# Altium PCB Rx_pcb.PcbDoc (part 1 of 2)
Units mm, origin at the board's own origin, x right, y up, seen from the top; angles counter-clockwise.
Board outline 77.98 x 77.98 mm, 4 copper layers (Top Layer, MidLayer1, MidLayer2, Bottom Layer); 173 components, 127 nets, 641 pads, 155 vias.
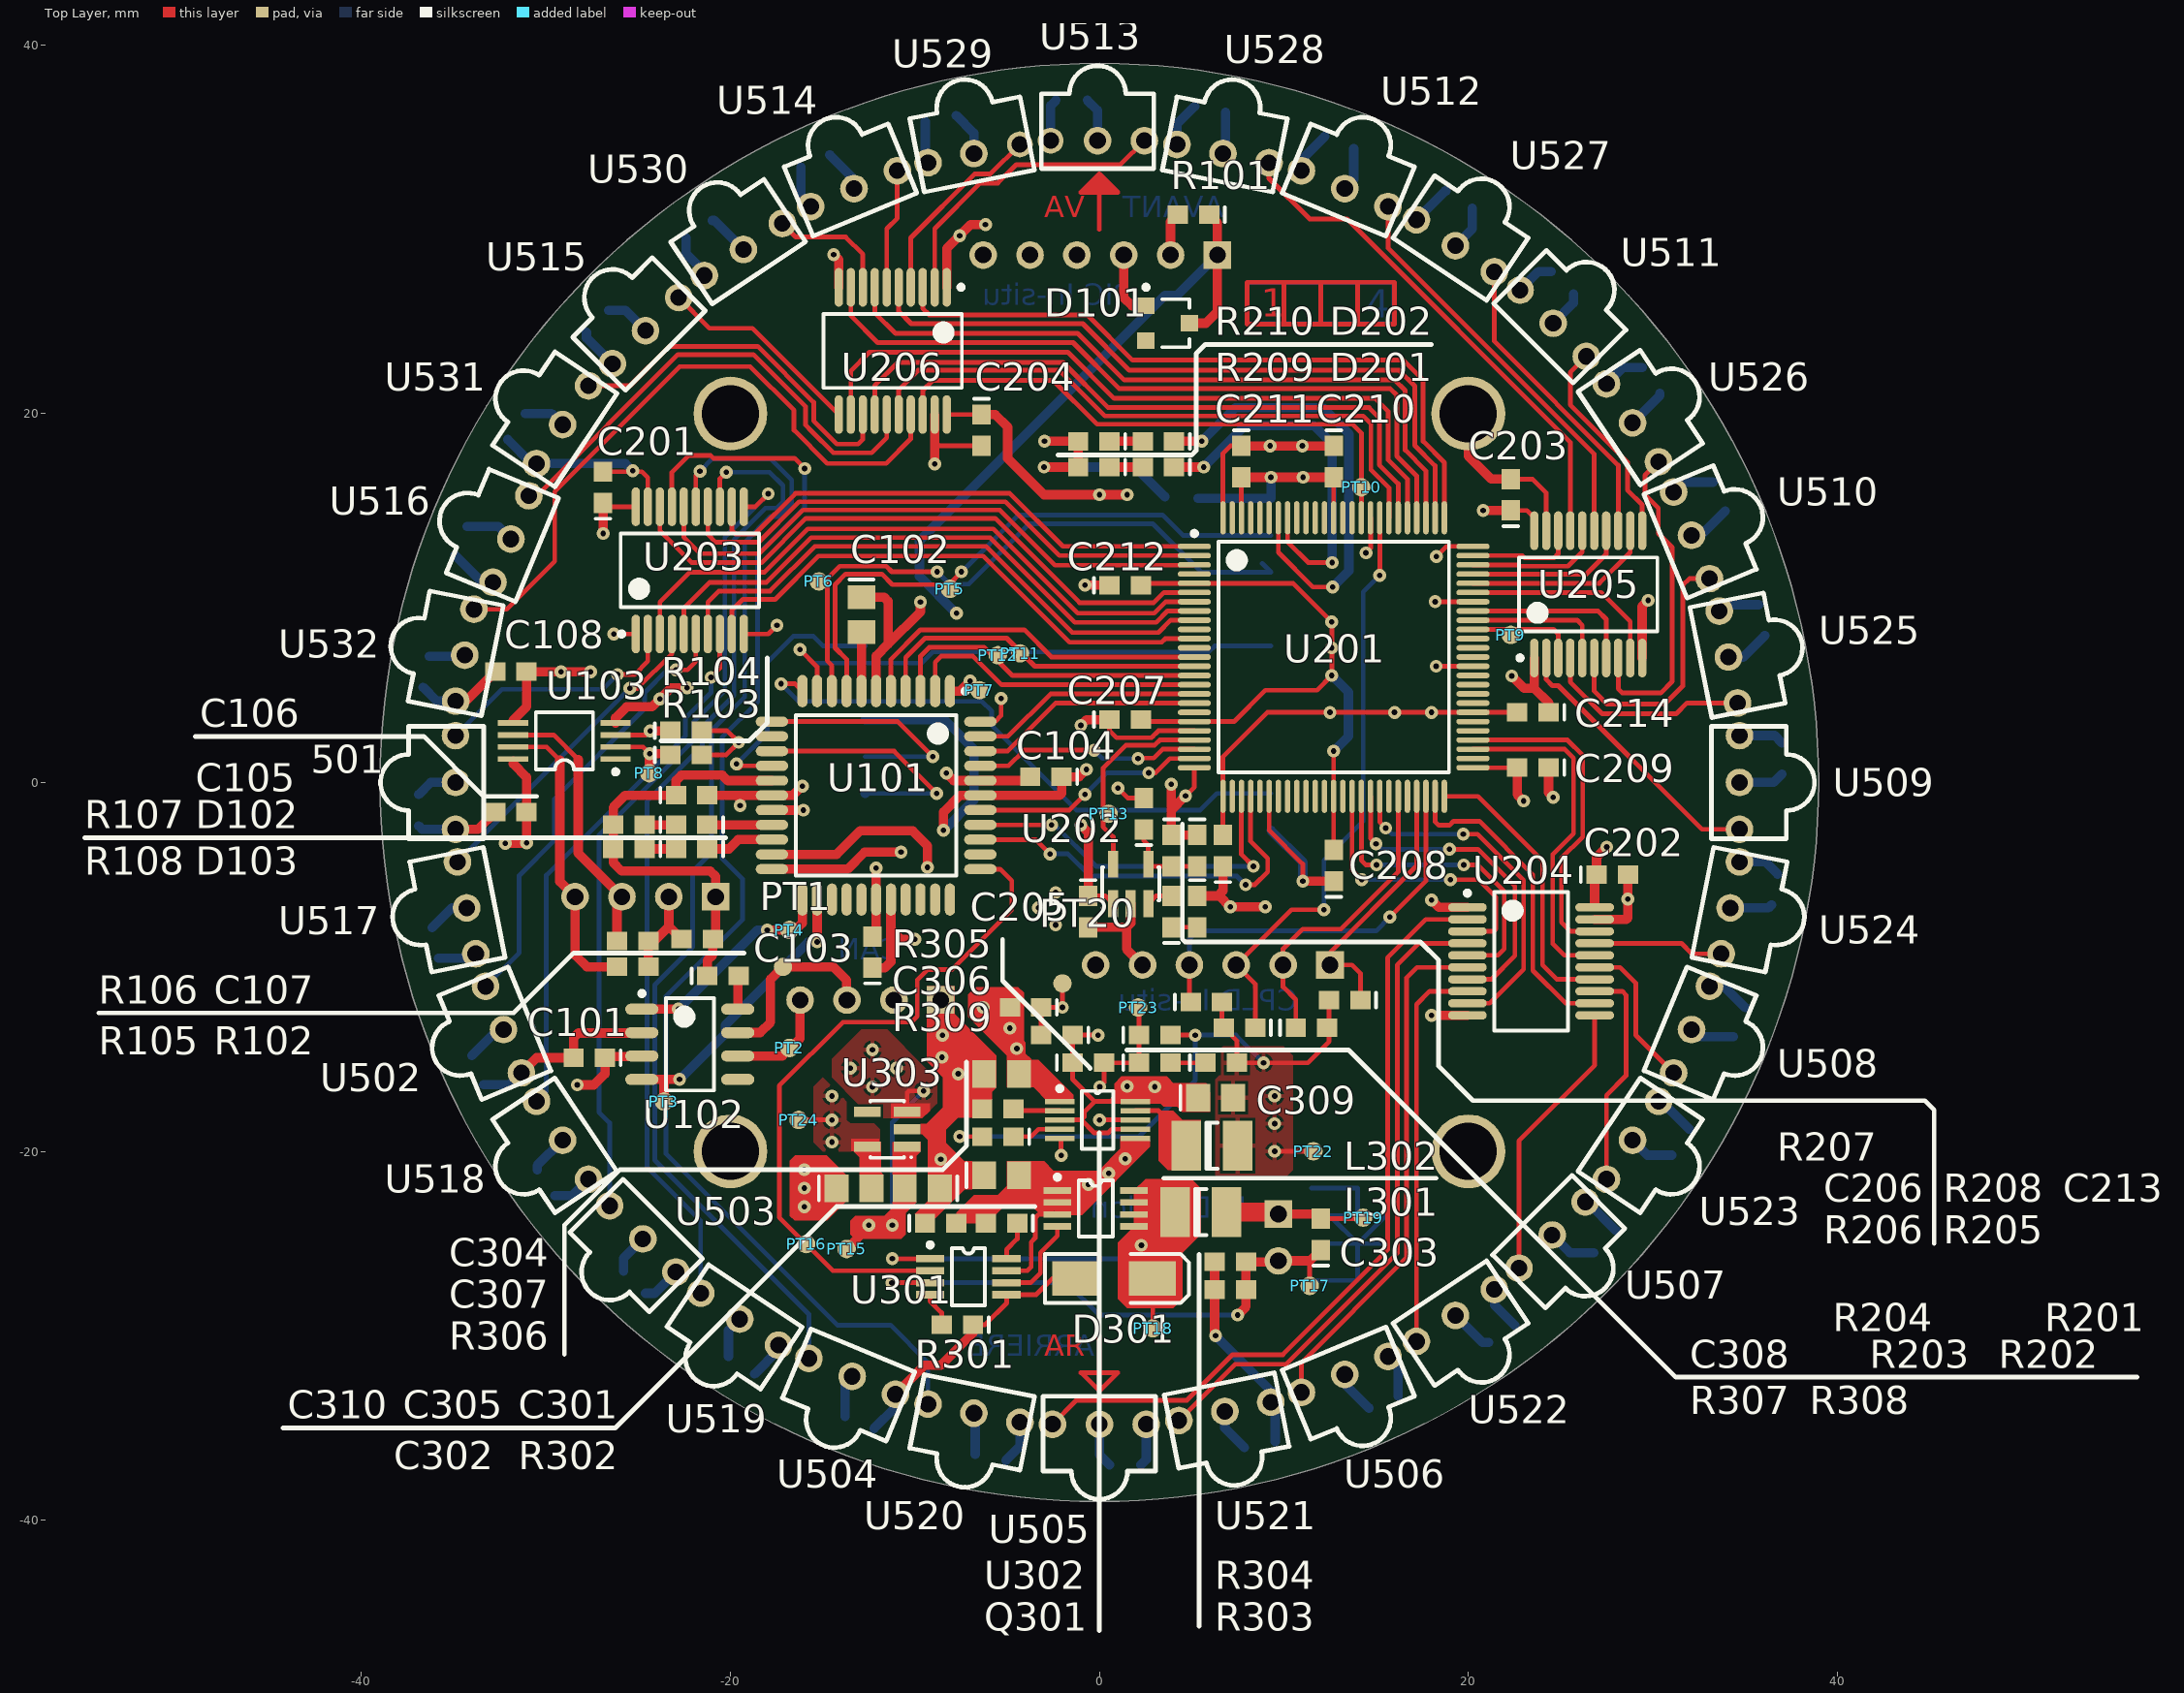
[diagram p0: Top Layer view]
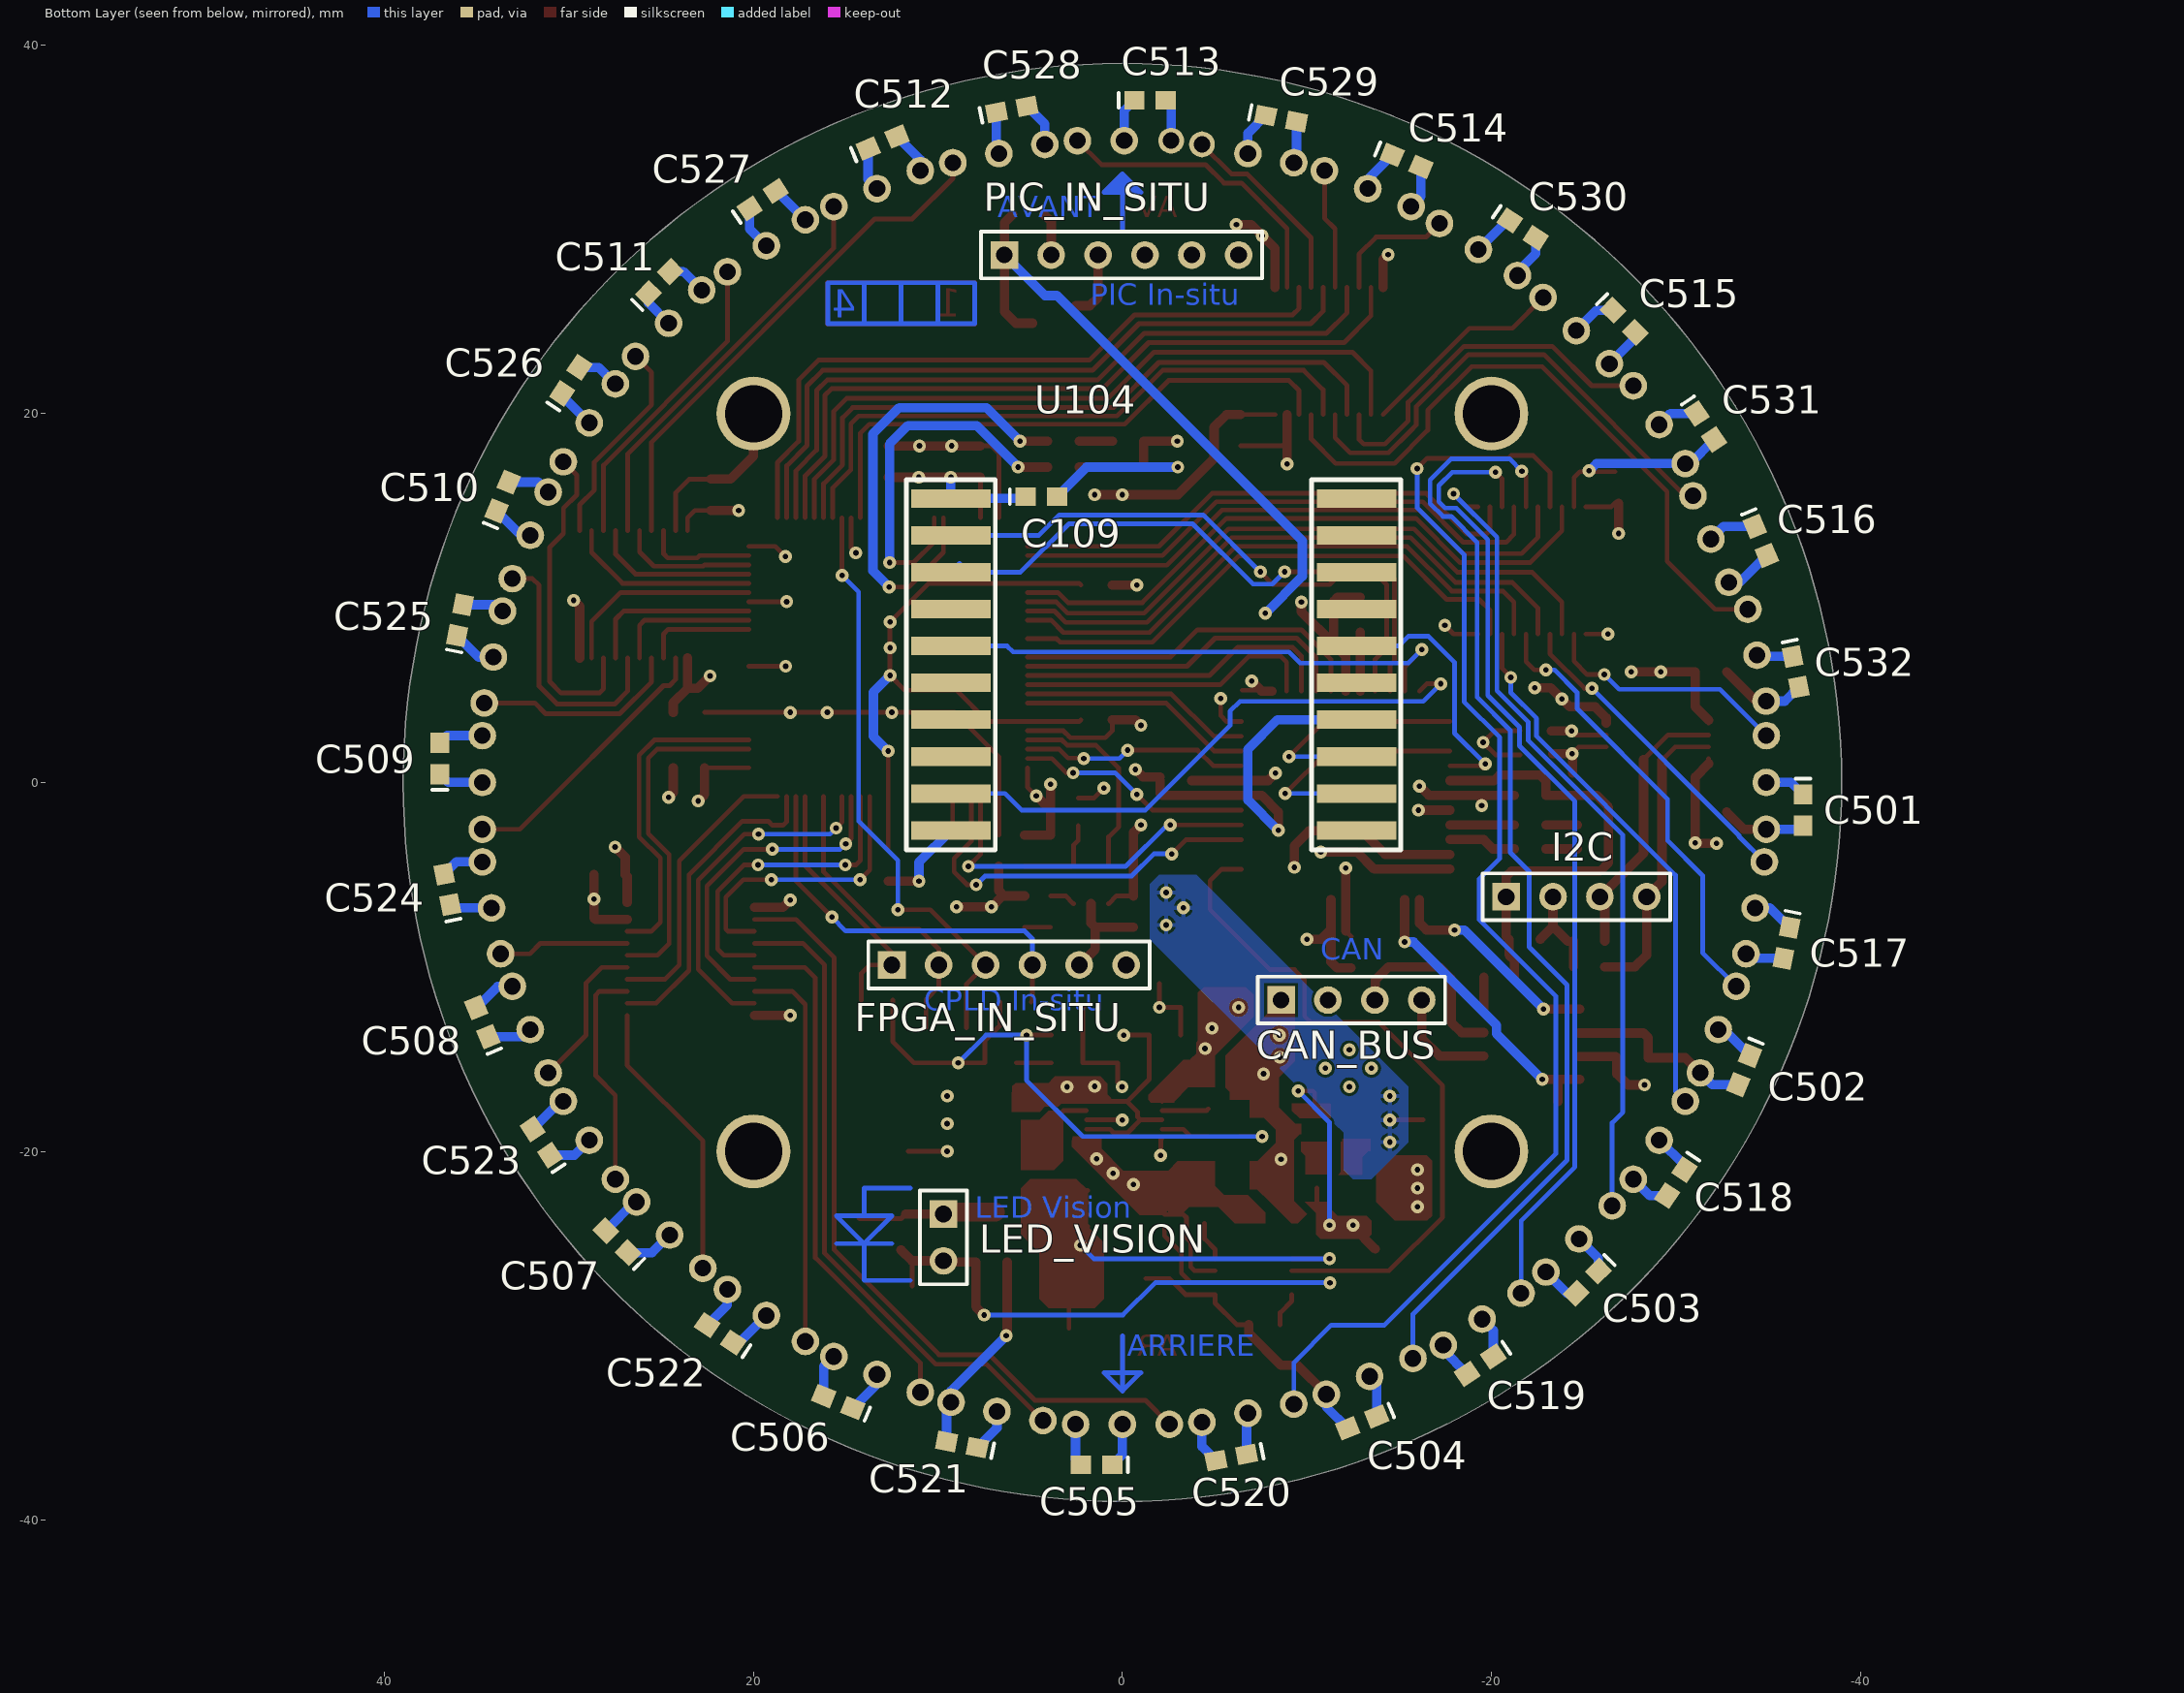
[diagram p1: Bottom Layer view, seen from below]
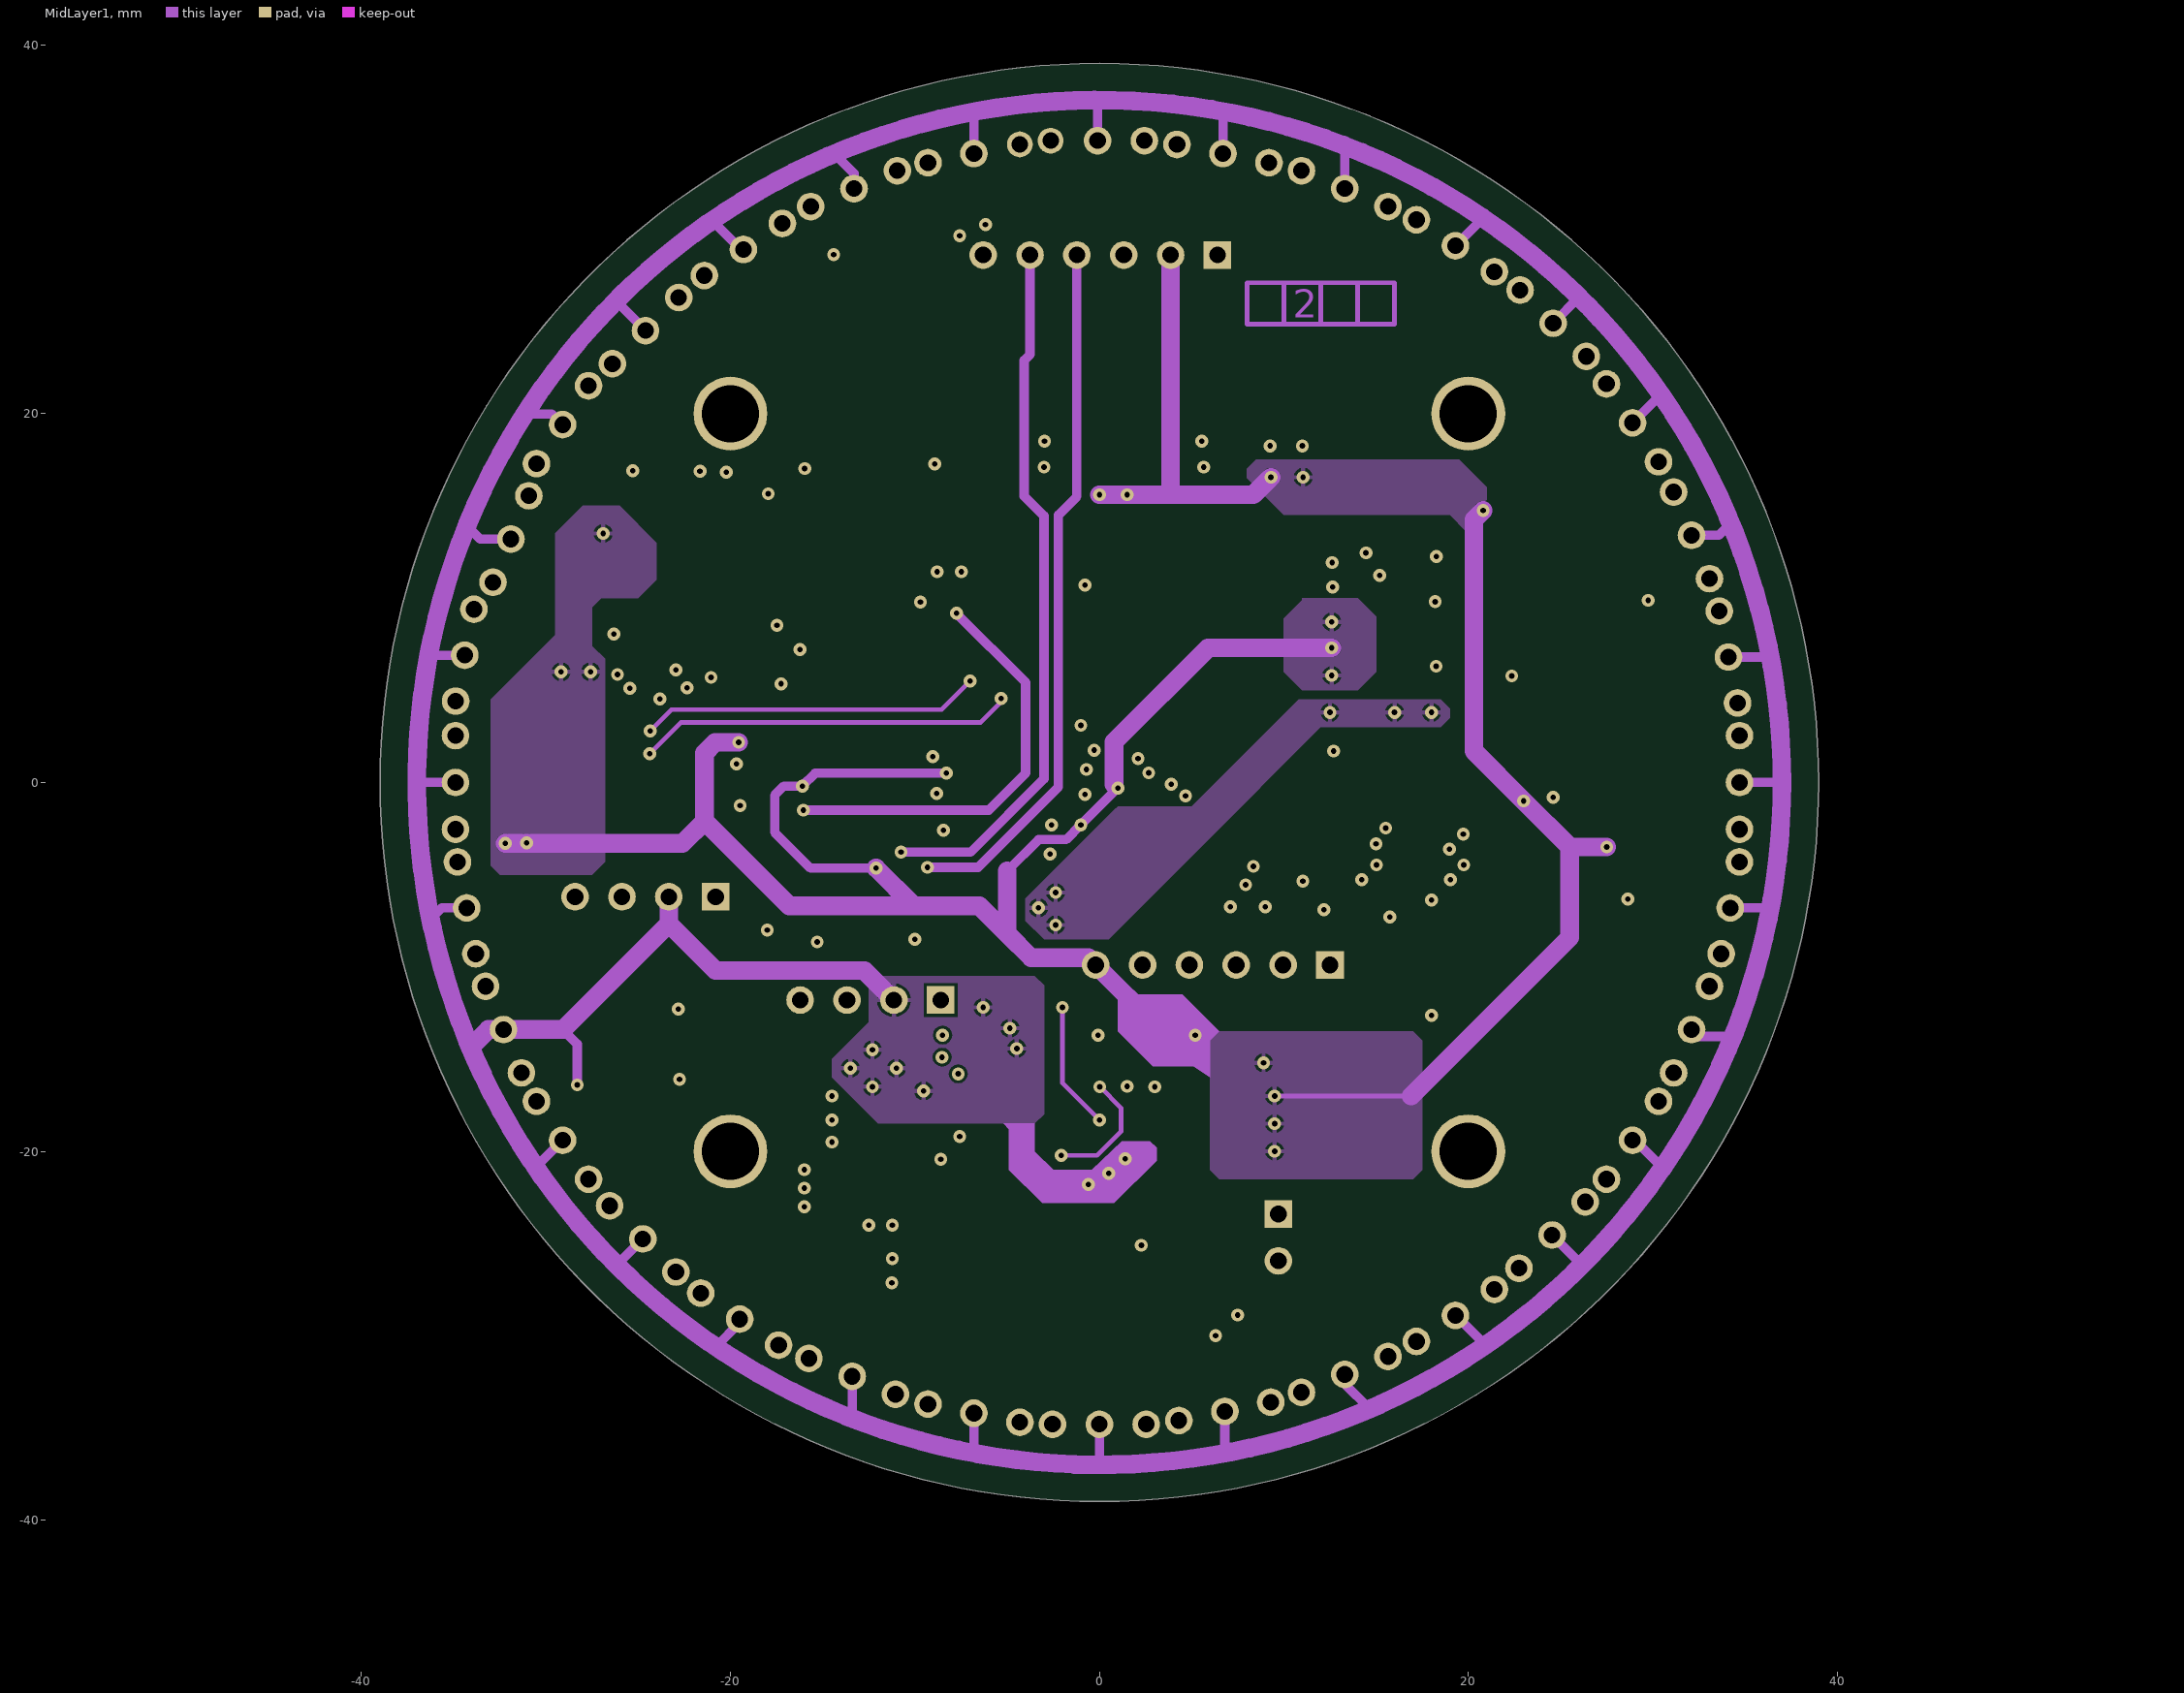
[diagram p2: MidLayer1]
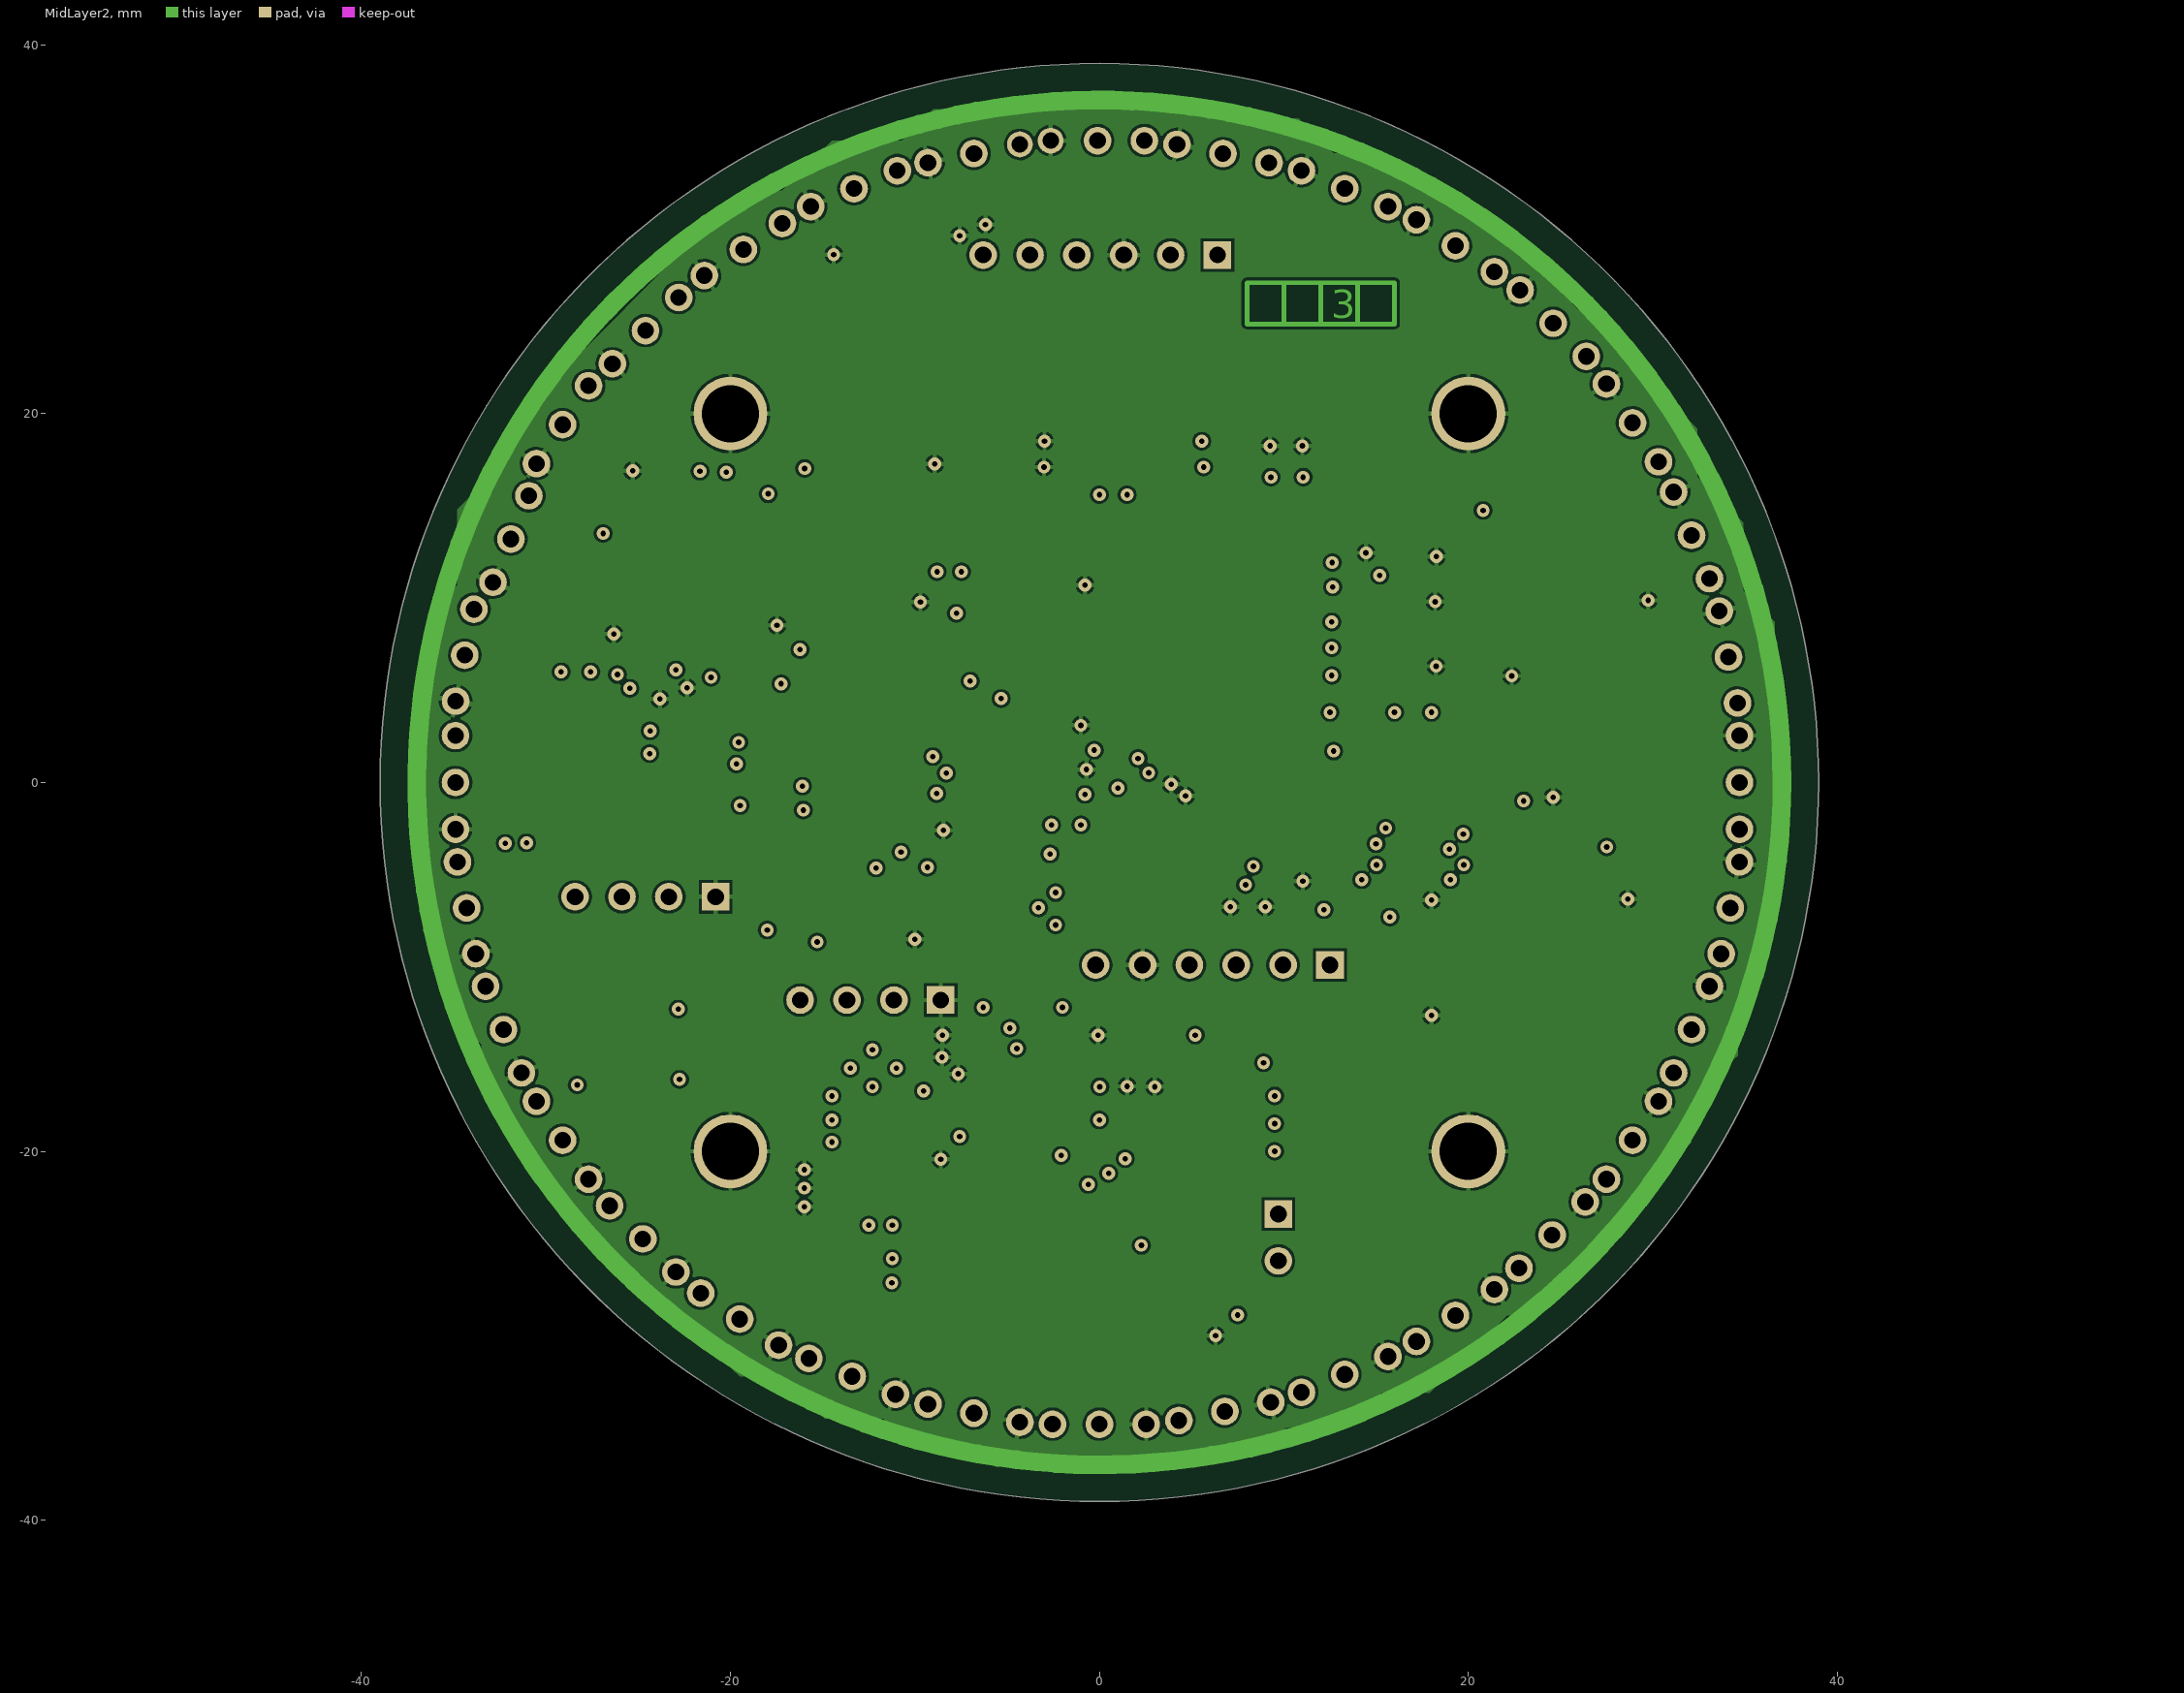
[diagram p3: MidLayer2]

## Layer stack, top to bottom
Top Layer: signal copper 0.0356
Dielectric: core 0.32, FR-4, Dk 4.8
MidLayer1: signal copper 0.0356
Dielectric: prepreg 0.32, FR-4, Dk 4.8
MidLayer2: signal copper 0.0356
Dielectric: core 0.32, FR-4, Dk 4.8
Bottom Layer: signal copper 0.0356

## Board outline
-38.989,0 ccw(c0,0) 0,-38.989 ccw(c0,0) 38.989,0 ccw(c0,0) 0,38.989 ccw(c0,0)

## Design rules (kind name [scope] priority, off if disabled: settings)
Clearance [All] p1: gap=0.15
ComponentClearance [All] p1: gap=0.01 collisioncheckmode=3 verticalgap=0.254 showdistances=TRUE
FanoutControl Fanout_Default [All] p5: bgadir=Out bgaviamode=Centered fanoutstyle=Auto fanoutdirection=None viagrid=0.025 // Fanout_Default (Default Rule)
HoleSize [All] p1: absolutevalues=TRUE maxlimit=6 minlimit=0.3 maxpercent=80.000 minpercent=20.000
PolygonConnect [All] p1: connectstyle=Relief reliefconductorwidth=0.254 reliefentries=4 polygonreliefangle="90 Angle"
RoomDefinition Rx_TSOP [InComponentClass('Rx_TSOP')] p1: confinementstyle=ConfineIn formatcopy=TRUE lockcomponents=FALSE outline -40,-40 40,-40 40,40 -40,40
RoomDefinition Rx_power [InComponentClass('Rx_power')] p2: confinementstyle=ConfineIn formatcopy=TRUE lockcomponents=FALSE outline -25.527,-40 25.273,-40 25.273,-3.048 -25.527,-3.048
RoomDefinition Rx_micro [InComponentClass('Rx_micro')] p3: confinementstyle=ConfineIn formatcopy=TRUE lockcomponents=FALSE outline -40,-40 40,-40 40,40 -40,40
RoomDefinition Rx_logic [InComponentClass('Rx_logic')] p4: confinementstyle=ConfineIn formatcopy=TRUE lockcomponents=FALSE outline -40,-40 40,-40 40,40 -40,40
RoutingVias [All] p1: holewidth=0.711 width=1.27 viastyle="Through Hole" minholewidth=0.3 minwidth=0.7 maxholewidth=1 maxwidth=1.4
SolderMaskExpansion [All] p1: expansion=0.102
TestPointUsage [All] p1: valid=0 allowmultiple=FALSE
Testpoint [All] p1: side=15 testpointundercomponent=TRUE minsize=1.016 maxsize=2.54 preferedsize=1.524 minholesize=0 maxholesize=1.016 preferedholesize=0.813 testpointgrid=0.025 style=1021 order=0-112345678
Width [All] p1: maxlimit=1.016 minlimit=0.15 preferedwidth=0.254
16 further rules are at their usual default settings.

## Classes and differential pairs
component class Rx_TSOP: 501 C501 C502 C503 C504 C505 C506 C507 C508 C509 C510 C511 C512 C513 C514 C515 C516 C517 C518 C519 C520 C521 C522 C523 C524 C525 C526 C527 C528 C529 C530 C531 C532 U502 U503 U504 U505 U506 U507 U508 U509 U510 U511 U512 U513 U514 U515 U516 U517 U518 U519 U520 U521 U522 U523 U524 U525 U526 U527 U528 U529 U530 U531 U532
component class Rx_logic: C201 C202 C203 C204 C205 C206 C207 C208 C209 C210 C211 C212 C213 C214 D201 D202 FPGA_IN_SITU PT9 PT10 PT11 PT12 PT13 R201 R202 R203 R204 R205 R206 R207 R208 R209 R210 U201 U202 U203 U204 U205 U206
component class Rx_micro: C101 C102 C103 C104 C105 C106 C107 C108 C109 C? CAN_BUS D101 D102 D103 D? I2C PIC_IN_SITU PT1 PT2 PT3 PT4 PT5 PT6 PT7 PT8 R101 R102 R103 R104 R105 R106 R107 R108 R? S101 U101 U102 U103 U104 U?
component class Rx_power: C301 C302 C303 C304 C305 C306 C307 C308 C309 C310 D301 L301 L302 LED_VISION PT15 PT16 PT17 PT18 PT19 PT20 PT22 PT23 PT24 Q301 R301 R302 R303 R304 R305 R306 R307 R308 R309 U301 U302 U303

## Components (designator, comment, footprint, x,y, rotation, side; value= is the part's Value field where it differs from the comment)
501 "TSOP22xx" TSOP22xx#1 -34.9,0 r0 top
C101 "100n cap 0603 X7R 25V" 0603 -27.65,-14.925 r180 top
C102 "10u cap 0805 X7R 25V" 0805 -12.9,9.1 r270 top
C103 "100n cap 0603 X7R 25V" 0603 -12.3,-9.2 r90 top
C104 "100n cap 0603 X7R 25V" 0603 -2.9,0.3 r180 top
C105 "100n cap 0603 X7R 25V" 0603 -22.1,-0.7 r0 top
C106 "100n cap 0603 X7R 25V" 1608[0603] -31.9,-1.6 r180 top
C107 "100n cap 0603 X7R 25V" 1608[0603] -21.8,-8.5 r180 top
C108 "100p cap 0603 X7R 25V" 1608[0603] -31.9,6 r0 top
C109 "100n cap 0603 X7R 25V" 0603 4.4,15.5 r180 bottom
C201 "100n cap 0603 X7R 25V" 0603 -26.9,16 r90 top
C202 "100n cap 0603 X7R 25V" 0603 27.8,-5 r0 top
C203 "100n cap 0603 X7R 25V" 0603 22.3,15.6 r90 top
C204 "100n cap 0603 X7R 25V" 0603 -6.4,19.1 r270 top
C205 "100n cap 0603 X7R 25V" 0603 -0.6,-7 r270 top
C206 "100n cap 0603 X7R 25V" 0603 3.9,-3.7 r270 top
C207 "10n cap 0603 X7R 25V" 0603 1.4,3.4 r0 top
C208 "10n cap 0603 X7R 25V" 0603 12.7,-4.5 r90 top
C209 "10n cap 0603 X7R 25V" 0603 23.5,0.8 r180 top
C210 "10n cap 0603 X7R 25V" 0603 12.7,17.4 r270 top
C211 "10n cap 0603 X7R 25V" 0603 7.7,17.4 r270 top
C212 "10n cap 0603 X7R 25V" 0603 1.4,10.7 r0 top
C213 "10n cap 0603 X7R 25V" 0603 6.7,-3.7 r90 top
C214 "10n cap 0603 X7R 25V" 0603 23.5,3.8 r180 top
C301 "10u cap 0805 X7R 10V" 0805 -5.3,-21.3 r0 top
C302 "100n cap 0603 X7R 25V" 0603 -8.6,-23.9 r0 top
C303 "1u cap 0603 X7R 25V" 0603 12,-24.5 r90 top
C304 "10u cap 0805 X7R 10V" 0805 -5.3,-15.8 r0 top
C305 "10u cap 0805 X7R 10V" 0805 -9.6,-22 r180 top
C306 "100p cap 0603 cog 25V" 0603 -2.3,-13.7 r180 top
C307 "100n cap 0603 X7R 25V" 0603 -5.5,-17.7 r0 top
C308 "10p cap 0603 cog 25V" 0603 3,-13.7 r0 top
C309 "10u cap 0805 X7R 10V" 0805 6.3,-17.1 r0 top
C310 "10u cap 0805 X7R 10V" 0805 -13.3,-22 r0 top
C501 "4.7u cap 0603 X7R 25V" 0603 -36.9,-1.5 r270 bottom
C502 "4.7u cap 0603 X7R 25V" 0603 -33.7,-15.6 r292.5 bottom
C503 "4.7u cap 0603 X7R 25V" 0603 -25.2,-27.1 r315 bottom
C504 "4.7u cap 0603 X7R 25V" 0603 -13,-34.7 r337.5 bottom
C505 "4.7u cap 0603 X7R 25V" 0603 1.4,-37 r0 bottom
C506 "4.7u cap 0603 X7R 25V" 0603 15.4,-33.6 r22.5 bottom
C507 "4.7u cap 0603 X7R 25V" 0603 27.4,-24.9 r45 bottom
C508 "4.7u cap 0603 X7R 25V" 0603 34.7,-13 r67.5 bottom
C509 "4.7u cap 0603 X7R 25V" 0603 37,1.3 r90 bottom
C510 "4.7u cap 0603 X7R 25V" 0603 33.6,15.5 r112.5 bottom
C511 "4.7u cap 0603 X7R 25V" 0603 25.1,27.1 r135 bottom
C512 "4.7u cap 0603 X7R 25V" 0603 13,34.7 r157.5 bottom
C513 "4.7u cap 0603 X7R 25V" 0603 -1.5,37 r180 bottom
C514 "4.7u cap 0603 X7R 25V" 0603 -15.4,33.7 r202.5 bottom
C515 "4.7u cap 0603 X7R 25V" 0603 -27.2,25 r225 bottom
C516 "4.7u cap 0603 X7R 25V" 0603 -34.6,13.1 r247.5 bottom
C517 "4.7u cap 0603 X7R 25V" 0603 -36,-8.7 r281.25 bottom
C518 "4.7u cap 0603 X7R 25V" 0603 -30,-21.7 r303.75 bottom
C519 "4.7u cap 0603 X7R 25V" 0603 -19.4,-31.6 r326.25 bottom
C520 "4.7u cap 0603 X7R 25V" 0603 -5.9,-36.6 r348.75 bottom
C521 "4.7u cap 0603 X7R 25V" 0603 8.7,-35.9 r11.25 bottom
C522 "4.7u cap 0603 X7R 25V" 0603 21.8,-29.9 r33.75 bottom
C523 "4.7u cap 0603 X7R 25V" 0603 31.5,-19.5 r56.25 bottom
C524 "4.7u cap 0603 X7R 25V" 0603 36.6,-5.8 r78.75 bottom
C525 "4.7u cap 0603 X7R 25V" 0603 35.9,8.8 r101.25 bottom
C526 "4.7u cap 0603 X7R 25V" 0603 29.9,21.8 r123.75 bottom
C527 "4.7u cap 0603 X7R 25V" 0603 19.5,31.6 r146.25 bottom
C528 "4.7u cap 0603 X7R 25V" 0603 6,36.5 r168.75 bottom
C529 "4.7u cap 0603 X7R 25V" 0603 -8.6,36 r191.25 bottom
C530 "4.7u cap 0603 X7R 25V" 0603 -21.7,30 r213.75 bottom
C531 "4.7u cap 0603 X7R 25V" 0603 -31.6,19.3 r236.25 bottom
C532 "4.7u cap 0603 X7R 25V" 0603 -36.5,6 r258.75 bottom
CAN_BUS "Header 4" HDR1X4 -8.6,-11.8 r180 bottom
D101 "BZX84C5V6LT1" 318-07 3.7,24.9 r270 top
D102 "LED0" 0603 -22.1,-2.3 r180 top
D103 "LED0" 0603 -22.1,-3.6 r180 top
D201 "LED0" 0603 3.2,17.1 r180 top
D202 "LED0" 0603 3.2,18.5 r180 top
D301 "10MQ040" D-64 0.8,-26.9 r0 top
FPGA_IN_SITU "Header 6" HDR1X6 12.5,-9.9 r180 bottom
I2C "Header 4" HDR1X4 -20.8,-6.2 r180 bottom
L301 "B82422H1223K" 1210 5.5,-23.3 r0 top
L302 "B82422H1223K" 1210 6.1,-19.7 r0 top
LED_VISION "Header 2" HDR1X2 9.7,-23.4 r270 bottom
PIC_IN_SITU "Header 6" HDR1X6 6.4,28.6 r180 bottom
PT1 "Plug" TP#1 -17.15,-10 r0 top
PT2 "Plug" TP#1 -16.8,-14.4 r0 top
PT3 "Plug" TP#1 -23.6,-17.3 r0 top
PT4 "Plug" TP#1 -16.8,-8 r0 top
PT5 "Plug" TP#1 -8.1,10.5 r0 top
PT6 "Plug" TP#1 -15.2,10.9 r0 top
PT7 "Plug" TP#1 -6.5,5 r0 top
PT8 "Plug" TP#1 -24.4,0.5 r0 top
PT9 "Plug" TP#1 22.3,8 r0 top
PT10 "Plug" TP#1 14.2,16 r0 top
PT11 "Plug" TP#2 -4.8,7 r0 top
PT12 "Plug" TP#1 -5.5,6.9 r0 top
PT13 "Plug" TP#1 0.5,-1.7 r0 top
PT15 "Plug" TP#1 -13.7,-25.3 r0 top
PT16 "Plug" TP#1 -15.895,-25.03 r0 top
PT17 "Plug" TP#1 11.4,-27.3 r0 top
PT18 "Plug" TP#1 2.9,-29.6 r0 top
PT19 "Plug" TP#1 14.3,-23.6 r0 top
PT20 "Plug" TP#1 -2,-10.9 r0 top
PT22 "Plug" TP#1 11.6,-20 r0 top
PT23 "Plug" TP#1 2.1,-12.2 r0 top
PT24 "Plug" TP#1 -16.3,-18.3 r0 top
Q301 "IRF7604" Micro8 -0.2,-23.1 r270 top
R101 "Res 10k 100mW" 0603 5.1,30.8 r180 top
R102 "Res 10k 100mW" 0603 -20.4,-10.5 r0 top
R103 "Res 10k 100mW" 0603 -22.4,1.5 r0 top
R104 "Res 10k 100mW" 0603 -22.4,2.8 r0 top
R105 "Res 10k 100mW" 1608[0603] -25.3,-10 r0 top
R106 "Res 10k 100mW" 1608[0603] -25.3,-8.6 r0 top
R107 "Res 680 100mW" 0603 -25.5,-2.3 r180 top
R108 "Res 680 100mW" 0603 -25.5,-3.6 r180 top
R201 "Res 10k 100mW" 0603 13.3,-11.8 r180 top
R202 "Res 10k 100mW" 0603 11.5,-13.3 r0 top
R203 "Res 10k 100mW" 0603 7.6,-13.3 r180 top
R204 "Res 10k 100mW" 0603 5.8,-11.9 r0 top
R205 "Res 33k 100mW" 0603 5.3,-7 r270 top
R206 "Res 10k 100mW" 0603 3.9,-7 r90 top
R207 "Res 10k 100mW" 0603 2.4,-1.7 r90 top
R208 "Res 10k 100mW" 0603 5.3,-3.7 r270 top
R209 "Res 680 100mW" 0603 -0.3,17.1 r180 top
R210 "Res 680 100mW" 0603 -0.3,18.5 r180 top
R301 "Res 6.8k 100mW" 0603 -7.7,-29.4 r180 top
R302 "Res 4.7k 100mW" 0603 -5.3,-23.9 r180 top
R303 "Res 10 100mW" 0603 7.1,-27.5 r0 top
R304 "Res 22 100mW" 0603 7.1,-26 r0 top
R305 "Res 560k 100mW" 0603 -4,-12.2 r180 top
R306 "Res 680k 100mW" 0603 -5.5,-19.2 r180 top
R307 "Res 75k 100mW" 0603 3,-15.2 r0 top
R308 "Res 560k 100mW" 0603 6.6,-15.2 r0 top
R309 "Res 100k 100mW" 0603 -0.6,-15.2 r0 top
U101 "PIC24HJ128GP504-E/PT" TQFP-PT44_N -12.1,-0.7 r270 top
U102 "MCP2551" SOIC150-8_N -22.2,-14.2 r0 top
U103 "PCA9515" TSSOP-8 -29,2.25 r90 top
U104 "XBee" XBee_SM 9.3,15.4 r180 bottom
U201 "XC2C128-6VQ100C" VQ100_N 12.7,6.8 r0 top
U202 "LTC6905" SOT23-5 1.7,-5.5 r0 top
U203 "SN74LVC244DB" DB020_N -22.2,11.5 r90 top
U204 "SN74LVC244DB" DB020_N 23.4,-9.7 r0 top
U205 "SN74LVC244DB" DB020_N 26.5,10.2 r90 top
U206 "SN74LVC244DB" DB020_N -11.2,23.4 r270 top
U301 "LM3401" MSOP8 -7.1,-26.8 r270 top
U302 "TPS62000" MS10 -0.1,-18.3 r270 top
U303 "TLV70018" SOT23-5 -11.5,-18.8 r90 top
U502 "TSOP22xx" TSOP22xx#1 -32.3,-13.4 r22.5 top
U503 "TSOP22xx" TSOP22xx#1 -24.75,-24.75 r45 top
U504 "TSOP22xx" TSOP22xx#1 -13.4,-32.2 r67.5 top
U505 "TSOP22xx" TSOP22xx#1 0,-34.8 r90 top
U506 "TSOP22xx" TSOP22xx#1 13.3,-32.1 r112.5 top
U507 "TSOP22xx" TSOP22xx#1 24.541,-24.541 r135 top
U508 "TSOP22xx" TSOP22xx#1 32.1,-13.4 r157.5 top
U509 "TSOP22xx" TSOP22xx#1 34.7,0 r180 top
U510 "TSOP22xx" TSOP22xx#1 32.1,13.4 r202.5 top
U511 "TSOP22xx" TSOP22xx#1 24.6,24.9 r225 top
U512 "TSOP22xx" TSOP22xx#1 13.3,32.2 r247.5 top
U513 "TSOP22xx" TSOP22xx#2 -0.1,34.8 r270 top
U514 "TSOP22xx" TSOP22xx#1 -13.3,32.2 r292.5 top
U515 "TSOP22xx" TSOP22xx#1 -24.6,24.5 r315 top
U516 "TSOP22xx" TSOP22xx#1 -31.9,13.2 r337.5 top
U517 "TSOP22xx" TSOP22xx#1 -34.3,-6.8 r11.25 top
U518 "TSOP22xx" TSOP22xx#1 -29.1,-19.4 r33.75 top
U519 "TSOP22xx" TSOP22xx#1 -19.5,-29.1 r56.25 top
U520 "TSOP22xx" TSOP22xx#1 -6.8,-34.2 r78.75 top
U521 "TSOP22xx" TSOP22xx#1 6.8,-34.1 r101.25 top
U522 "TSOP22xx" TSOP22xx#1 19.3,-28.9 r123.75 top
U523 "TSOP22xx" TSOP22xx#1 28.9,-19.4 r146.25 top
U524 "TSOP22xx" TSOP22xx#1 34.2,-6.8 r168.75 top
U525 "TSOP22xx" TSOP22xx#1 34.1,6.8 r191.25 top
U526 "TSOP22xx" TSOP22xx#1 28.9,19.5 r213.75 top
U527 "TSOP22xx" TSOP22xx#1 19.3,29.1 r236.25 top
U528 "TSOP22xx" TSOP22xx#1 6.7,34.1 r258.75 top
U529 "TSOP22xx" TSOP22xx#3 -6.8,34.1 r281.25 top
U530 "TSOP22xx" TSOP22xx#1 -19.3,28.9 r303.75 top
U531 "TSOP22xx" TSOP22xx#1 -29.1,19.4 r326.25 top
U532 "TSOP22xx" TSOP22xx#1 -34.4,6.9 r348.75 top

## Footprints (in the part's own frame and the unit in brackets; to place one, negate y for a bottom-side part, rotate by r counter-clockwise, add the part's x,y. Pads: shape width x height; smd on the part's side, far side on the other; paste and mask are expansions set on the pad)
318-07 [mm] "SOT-23; 3 Leads; Body 3.0 x 2.5 mm, inc. leads (LxW max)"
  rect 0.9x0.95 smd: 1(-0.95,-1.175) 2(0.95,-1.175) 3(0,1.175)
  silkscreen extent -2.07,-1.3 1.3,1.18
0603 [mm] "Chip Capacitor; Body 1.6 x 0.8 mm (LxW typ)"
  rect 1.1x1 smd: 1(-0.85,0) 2(0.85,0)
  silkscreen extent -1.7,-0.4 -1.7,0.4
0805 [mm] "Chip Capacitor; Body 2.0 x 1.2 mm (LxW typ)"
  rect 1.3x1.5 smd: 1(-0.95,0) 2(0.95,0)
  silkscreen extent -1.9,-0.65 -1.9,0.65
1210 [mm] "Chip Capacitor; Body 3.2 x 2.5 mm (LxW typ)"
  rect 1.6x2.7 smd: 1(-1.4,0) 2(1.4,0)
  silkscreen extent -0.3,-1.25 0.3,1.25
1608[0603] [mm] "Chip Capacitor; Body 1.6 x 0.8 mm (LxW typ)"
  rect 1.1x1 smd: 1(-0.85,0) 2(0.85,0)
D-64 [mm] "DO-214-AC/SMA; 2 C-Bend Leads; Body 5.3 x 2.6 mm, inc. leads (LxW)"
  rect 2.55x1.85 smd: 1(-2.075,0) 2(2.075,0)
  silkscreen extent -3.75,-1.33 4.05,1.33
DB020_N [mm] "SOP, 20-Leads, Body 7.2x5.3mm, Pitch 0.65mm, IPC Medium Density"
  oval 2.1x0.45 smd: 1(-3.45,2.925) 2(-3.45,2.275) 3(-3.45,1.625) 4(-3.45,0.975) 5(-3.45,0.325) 6(-3.45,-0.325) 7(-3.45,-0.975) 8(-3.45,-1.625) 9(-3.45,-2.275) 10(-3.45,-2.925) 11(3.45,-2.925) 12(3.45,-2.275) 13(3.45,-1.625) 14(3.45,-0.975) 15(3.45,-0.325) 16(3.45,0.325) 17(3.45,0.975) 18(3.45,1.625) 19(3.45,2.275) 20(3.45,2.925)
  silkscreen extent -3.57,-3.75 2,3.82, body extent -2.7,-3.75 2.7,3.75, height 2
HDR1X2 [mm] "Connector; Header; 2 Position"
  rect 1.5x1.5 hole 0.9: 1(0,0)
  round 1.5 hole 0.9: 2(2.54,0)
  silkscreen extent -1.27,-1.27 3.81,1.27
HDR1X4 [mm] "Connector; Header; 4 Position"
  rect 1.5x1.5 hole 0.9: 1(0,0)
  round 1.5 hole 0.9: 2(2.54,0) 3(5.08,0) 4(7.62,0)
  silkscreen extent -1.27,-1.27 8.89,1.27
HDR1X6 [mm] "Connector; Header; 6 Position"
  rect 1.5x1.5 hole 0.9: 1(0,0)
  round 1.5 hole 0.9: 2(2.54,0) 3(5.08,0) 4(7.62,0) 5(10.16,0) 6(12.7,0)
  silkscreen extent -1.27,-1.27 13.97,1.27
Micro8 [mm] "Shrink Small Outline; 8 Leads; Body Width 3 mm; Pitch 0.65 mm"
  rect 0.35x1.5 smd: 1(-0.975,-2.075) 2(-0.325,-2.075) 3(0.325,-2.075) 4(0.975,-2.075) 5(0.975,2.075) 6(0.325,2.075) 7(-0.325,2.075) 8(-0.975,2.075)
  silkscreen extent -1.82,-2.2 1.52,0.92
MS10 [mm] "Shrink Small Outline; 10 Leads; Body Width 3 mm; Pitch 0.5 mm"
  rect 0.3x1.6 smd: 1(-1,-2.05) 2(-0.5,-2.05) 3(0,-2.05) 4(0.5,-2.05) 5(1,-2.05) 6(1,2.05) 7(0.5,2.05) 8(0,2.05) 9(-0.5,2.05) 10(-1,2.05)
  silkscreen extent -1.82,-2.17 1.58,0.85
MSOP8 [mm] "Shrink Small Outline; 8 Leads; Body Width 3 mm; Pitch 0.65 mm"
  rect 0.4x1.55 smd: 1(-0.975,-2.075) 2(-0.325,-2.075) 3(0.325,-2.075) 4(0.975,-2.075) 5(0.975,2.075) 6(0.325,2.075) 7(-0.325,2.075) 8(-0.975,2.075)
  silkscreen extent -1.85,-2.2 1.55,0.9
SOIC150-8_N [mm] "SOIC, 8-Leads, Body 4.9x3.8mm, Pitch 1.27mm, IPC Medium Density"
  oval 1.8x0.6 smd: 1(-2.6,1.905) 2(-2.6,0.635) 3(-2.6,-0.635) 4(-2.6,-1.905) 5(2.6,-1.905) 6(2.6,-0.635) 7(2.6,0.635) 8(2.6,1.905)
  silkscreen extent -2.72,-2.5 1.3,2.88, body extent -2,-2.5 2,2.5, height 1.76
SOT23-5 [mm] "SOT-23/SC-74A; 5 Leads; Body 3 x 3 mm, inc. leads (LxW max)"
  rect 0.55x1.45 smd: 1(-0.95,-1.075) 2(0,-1.075) 3(0.95,-1.075) 4(0.95,1.075) 5(-0.95,1.075)
  silkscreen extent -1.57,-1.35 1.55,0.9
TP#1 [mm] "Test point"
  round 1 smd: 1(0,0)
TP#2 [mm] "Test point"
  round 1 smd: 1(0.5,0)
TQFP-PT44_N [mm] "Thin QFP, 44-Leads, Body 10x10mm, Pitch 0.8mm, IPC Medium Density"
  oval 1.75x0.55 smd: 1(-5.65,4) 2(-5.65,3.2) 3(-5.65,2.4) 4(-5.65,1.6) 5(-5.65,0.8) 6(-5.65,0) 7(-5.65,-0.8) 8(-5.65,-1.6) 9(-5.65,-2.4) 10(-5.65,-3.2) 11(-5.65,-4) 23(5.65,-4) 24(5.65,-3.2) 25(5.65,-2.4) 26(5.65,-1.6) 27(5.65,-0.8) 28(5.65,0) 29(5.65,0.8) 30(5.65,1.6) 31(5.65,2.4) 32(5.65,3.2) 33(5.65,4)
  oval 0.55x1.75 smd: 12(-4,-5.65) 13(-3.2,-5.65) 14(-2.4,-5.65) 15(-1.6,-5.65) 16(-0.8,-5.65) 17(0,-5.65) 18(0.8,-5.65) 19(1.6,-5.65) 20(2.4,-5.65) 21(3.2,-5.65) 22(4,-5.65) 34(4,5.65) 35(3.2,5.65) 36(2.4,5.65) 37(1.6,5.65) 38(0.8,5.65) 39(0,5.65) 40(-0.8,5.65) 41(-1.6,5.65) 42(-2.4,5.65) 43(-3.2,5.65) 44(-4,5.65)
  silkscreen extent -5.77,-4.35 4.35,4.95, body extent -5,-5 5,5, height 1.2
TSOP22xx#1 [mm]
  round 1.5 hole 0.9: 1(0,2.54) 2(0,0) 3(0,-2.54)
  silkscreen extent -4.06,-3.05 1.52,3.05
TSOP22xx#2 [mm]
  round 1.5 hole 0.9: 1(0,2.54) 2(0,0)
  round 1.4 hole 0.9: 3(0,-2.54)
  silkscreen extent -4.06,-3.05 1.52,3.05
TSOP22xx#3 [mm]
  round 1.4 hole 0.9: 1(0,2.54)
  round 1.5 hole 0.9: 2(0,0) 3(0,-2.54)
  silkscreen extent -4.06,-3.05 1.52,3.05
TSSOP-8 [mm] "Shrink Small Outline; 8 Leads; Body Width 4.4 mm; Pitch 0.65 mm"
  rect 0.3x1.65 smd: 1(-0.975,-2.775) 2(-0.325,-2.775) 3(0.325,-2.775) 4(0.975,-2.775) 5(0.975,2.775) 6(0.325,2.775) 7(-0.325,2.775) 8(-0.975,2.775)
  silkscreen extent -1.8,-2.9 1.55,1.55
VQ100_N [mm] "Thin QFP, 100-Leads, Body 14x14mm, Pitch 0.5mm, IPC Medium Density"
  oval 1.8x0.3 smd: 1(-7.55,6) 2(-7.55,5.5) 3(-7.55,5) 4(-7.55,4.5) 5(-7.55,4) 6(-7.55,3.5) 7(-7.55,3) 8(-7.55,2.5) 9(-7.55,2) 10(-7.55,1.5) 11(-7.55,1) 12(-7.55,0.5) 13(-7.55,0) 14(-7.55,-0.5) 15(-7.55,-1) 16(-7.55,-1.5) 17(-7.55,-2) 18(-7.55,-2.5) 19(-7.55,-3) 20(-7.55,-3.5) 21(-7.55,-4) 22(-7.55,-4.5) 23(-7.55,-5) 24(-7.55,-5.5) 25(-7.55,-6) 51(7.55,-6) 52(7.55,-5.5) 53(7.55,-5) 54(7.55,-4.5) 55(7.55,-4) 56(7.55,-3.5) 57(7.55,-3) 58(7.55,-2.5) 59(7.55,-2) 60(7.55,-1.5) 61(7.55,-1) 62(7.55,-0.5) 63(7.55,0) 64(7.55,0.5) 65(7.55,1) 66(7.55,1.5) 67(7.55,2) 68(7.55,2.5) 69(7.55,3) 70(7.55,3.5) 71(7.55,4) 72(7.55,4.5) 73(7.55,5) 74(7.55,5.5) 75(7.55,6)
  oval 0.3x1.8 smd: 26(-6,-7.55) 27(-5.5,-7.55) 28(-5,-7.55) 29(-4.5,-7.55) 30(-4,-7.55) 31(-3.5,-7.55) 32(-3,-7.55) 33(-2.5,-7.55) 34(-2,-7.55) 35(-1.5,-7.55) 36(-1,-7.55) 37(-0.5,-7.55) 38(0,-7.55) 39(0.5,-7.55) 40(1,-7.55) 41(1.5,-7.55) 42(2,-7.55) 43(2.5,-7.55) 44(3,-7.55) 45(3.5,-7.55) 46(4,-7.55) 47(4.5,-7.55) 48(5,-7.55) 49(5.5,-7.55) 50(6,-7.55) 76(6,7.55) 77(5.5,7.55) 78(5,7.55) 79(4.5,7.55) 80(4,7.55) 81(3.5,7.55) 82(3,7.55) 83(2.5,7.55) 84(2,7.55) 85(1.5,7.55) 86(1,7.55) 87(0.5,7.55) 88(0,7.55) 89(-0.5,7.55) 90(-1,7.55) 91(-1.5,7.55) 92(-2,7.55) 93(-2.5,7.55) 94(-3,7.55) 95(-3.5,7.55) 96(-4,7.55) 97(-4.5,7.55) 98(-5,7.55) 99(-5.5,7.55) 100(-6,7.55)
  silkscreen extent -7.67,-6.25 6.25,6.82, body extent -7,-7 7,7, height 1.2
XBee_SM [mm]
  rect 4.32x1 smd: 1(0,0) 2(0,-2) 3(0,-4) 4(0,-6) 5(0,-8) 6(0,-10) 7(0,-12) 8(0,-14) 9(0,-16) 10(0,-18) 11(22,-18) 12(22,-16) 13(22,-14) 14(22,-12) 15(22,-10) 16(22,-8) 17(22,-6) 18(22,-4) 19(22,-2) 20(22,0)
  silkscreen extent -2.41,-19.05 24.38,1.02

## Part data
501 U502 U503 U504 U505 U506 U507 U508 U509 U510 U511 U512 U513 U514 U515 U516 U517 U518 U519 U520 U521 U522 U523 U524 U525 U526 U527 U528 U529 U530 U531 U532: "IR Receiver Modules for Remote Control Systems"
C101 C102 C103 C104 C105 C106 C107 C108 C109 C201 C202 C203 C204 C205 C206 C207 C208 C209 C210 C211 C212 C213 C214 C301 C302 C303 C304 C305 C306 C307 C308 C309 C310 C501 C502 C503 C504 C505 C506 C507 C508 C509 C510 C511 C512 C513 C514 C515 C516 C517 C518 C519 C520 C521 C522 C523 C524 C525 C526 C527 C528 C529 C530 C531 C532: library part Cap, "Capacitor"
CAN_BUS I2C: "Header, 4-Pin"
D101: "Zener Voltage Regulator Diode"
D102 D103 D201 D202: "Typical INFRARED GaAs LED"
D301: "Schottky Rectifier"
FPGA_IN_SITU PIC_IN_SITU: "Header, 6-Pin"
L301 L302: library part Inductor, "Inductor"
LED_VISION: "Header, 2-Pin"
Q301: "HEXFET Power MOSFET"
R101 R102 R103 R104 R105 R106 R107 R108 R201 R202 R203 R204 R205 R206 R207 R208 R209 R210 R301 R302 R303 R304 R305 R306 R307 R308 R309: library part Res2, "Resistor"
U101: "High Speed General Purpose 16-Bit Flash Microcontroller, 128KB Flash, 8KB RAM, 44-Pin TQFP, Extended Temperature"
U102: "High Speed Can Transceiver"
U103: "I2C bus repeater"
U104: "OEM RF Modules"
U201: library part XC3S50AN-4TQG144C, "Spartan-3AN Non-Volatile FPGA, 108 User I/Os, 144-Pin TQFP, Standard Performance, Commercial Grade, Pb-Free"
U202: "17MHz to 170MHz Resistor Set SOT-23 Oscillator"
U203 U204 U205 U206: "Octal Buffer/Driver with 3-State Outputs"
U301: "Hysteretic PFET Controller for High Power LED Drive"
U302 U303: library part TPS6200x, "HIGH-EFFICIENCY STEP-DOWN LOW POWER DC-DC CONVERTER"

## Free pads (board coordinates)
  round 4 hole 3.1: 0(-20,-20) 1(20,-20) 2(20,20) 3(-20,20)

## Via types
v1: diameter 0.7, hole 0.3, Top Layer to Bottom Layer, 155 vias

## Nets (pads, with @x,y where several pads share a name; then routed paths per layer and width w, separated by ;. In a path a pad name is that pad's centre, name@x,y a point inside that pad or via, vN(x,y) a via of type N, cw(c..) or ccw(c..) an arc to the next point about the centre after c; other vN are vias at no path point)
+1.8V: C213.2 C214.2 C310.2 PT24.1 U201.26 U201.57 U303.5 | length 23
  Top Layer w0.254: PT24.1@-16.3,-18.3 v1(-14.5,-18.3) ; C213.2@6.7,-2.85 U201.26@6.7,-0.75 6.7,1.4 9.1,3.8 U201.57@20.25,3.8 C214.2@22.65,3.8
  other v1: -14.5,-19.5 -14.5,-17 -2.373,-7.727 -3.3,-6.8 -2.373,-5.973 12.5,3.8 16,3.8 18,3.8
+3.3V: C103.2 C104.2 C105.2 C106.1 C108.2 C109.1 C201.1 C202.1 C203.1 C204.1 C205.1 C207.2 C208.2 C209.2 C210.2 C211.2 C212.2 C308.2 C309.2 FPGA_IN_SITU.6 L302.2 PIC_IN_SITU.2 PT22.1 R101.2 R103.2 R104.2 R201.2 R202.2 R203.2 R204.2 R207.2 R306.2 R308.2 U101.17 U101.28 U101.40 U103.5 U103.8 U104.1 U201.5 U201.20 U201.38 U201.51 U201.88 U201.98 U202.1 U203.20 U204.20 U205.20 U206.20 | length 324.4
  Top Layer w0.254: -31.775,1.02 U103.8@-31.775,1.275 ; U103.5@-31.775,3.225 -31.775,3.38 ; C201.1@-26.7,15.15 -26.5,14.95 U203.20@-25.125,14.95 ; -20.9,1.5 R103.2@-21.55,1.5 -20.225,1.5 v1(-19.55,2.175) -20.175,2.8 R104.2@-21.55,2.8 -20.9,2.8 ; C103.2@-12.4,-8.35 C103.2@-12.1,-8.05 ; U206.20@-8.275,19.95 C204.1@-6.4,19.95 ; v1(-7.575,-19.2) R306.2@-6.35,-19.2 ; C205.1@-0.6,-6.15 0.325,-6.15 U202.1@0.75,-6.575 ; v1(1,-0.3) 1.55,-0.85 R207.2@2.4,-0.85 ; C207.2@2.25,3.4 2.35,3.3 U201.20@5.15,3.3 7.3,3.3 9,5 11.8,5 v1(12.6,5.8) v1(12.6,7.3) v1(12.6,8.7) 10.5,10.8 U201.5@5.15,10.8 2.35,10.8 C212.2@2.25,10.7 ; C308.2@3.85,-13.7 v1(5.2,-13.7) ; R204.2@6.65,-11.9 6.65,-13.2 R203.2@6.75,-13.3 7.45,-14 R308.2@7.45,-15.2 v1(8.9,-15.2) 11.3,-15.2 12.45,-14.05 R201.2@12.45,-11.8 ; U201.98@7.7,14.35 C211.2@7.7,16.55 ; v1(9.5,-20) PT22.1@11.6,-20 ; C208.2@12.7,-3.65 U201.38@12.7,-0.75 v1(12.7,1.7) ; U201.88@12.7,14.35 C210.2@12.7,16.55 ; U201.51@20.25,0.8 C209.2@22.65,0.8 ; C203.1@22.3,14.75 23.175,14.75 23.575,14.35 U205.20@23.575,13.65 ; C202.1@26.85,-5.1 C202.1@26.95,-5
  Top Layer w0.508: v1(-32.2,-3.3) v1@-31.025,-3.3 ; -31.775,1.02 -31.05,0.295 C106.1@-31.05,-1.6 v1(-31.05,-3.275) ; -31.775,3.38 -31.05,4.105 C108.2@-31.05,6 v1(-29.175,6) ; v1@-29.15,6.025 v1(-29.175,6) ; v1(-27.575,6) v1(-29.175,6) ; v1(-26.9,13.5) C201.1@-26.9,15.15 ; C105.2@-21.25,-0.7 -19.471,-0.7 ; v1(-19.475,-1.25) -19.471,-1.246 -19.471,-0.7 ; v1(-16.1,-0.2) -16.6,-0.7 U101.17@-17.75,-0.7 -19.471,-0.7 ; C103.2@-12.1,-8.05 U101.28@-12.1,-6.35 v1@-12.1,-4.65 ; v1(-8.3,0.5) -7.9,0.1 U101.40@-6.45,0.1 C104.2@-3.75,0.1 ; C204.1@-6.4,19.95 -5.65,19.95 -4.975,19.275 -4.975,17.575 -3,15.6 v1(1.5,15.6) ; v1(-1,-2.3) -0.6,-2.7 C205.1@-0.6,-6.15 ; PIC_IN_SITU.2@3.86,28.6 3.86,30.41 R101.2@4.25,30.8 ; C211.2@7.7,16.55 v1(9.3,16.55) v1(11.05,16.55) C210.2@12.7,16.55 ; v1(20.8,14.75) C203.1@22.3,14.75 ; C209.2@22.65,0.8 22.65,-0.65 v1(23,-1) ; 26.85,-6.5 C202.1@26.85,-5.1 ; C202.1@26.95,-5 26.95,-4.05 v1(27.5,-3.5)
  MidLayer1 w0.254: v1(9.5,-17) 16.9,-17
  MidLayer1 w0.508: v1(-12.106,-4.644) -15.656,-4.644 -17.6,-2.7 -17.6,-0.7 -17.1,-0.2 v1(-16.1,-0.2) -15.4,0.5 v1(-8.3,0.5) ; -5,-4.8 -3.3,-3.1 -1.8,-3.1 v1(-1,-2.3) v1(1,-0.3) v1@0.8,-0.1
  MidLayer1 w1.016: v1(-32.2,-3.3) -22.6,-3.3 -21.4,-2.1 ; v1(-19.55,2.175) -20.825,2.175 -21.4,1.6 -21.4,-2.1 ; v1(-12.106,-4.644) -10.05,-6.7 ; -5,-4.8 -5,-8.2 ; v1(0,15.6) v1(1.5,15.6) 4.4,15.6 ; v1@0.8,-0.1 0.8,2.2 5.9,7.3 v1(12.6,7.3) ; PIC_IN_SITU.2@3.86,28.6 3.86,15.6 4.4,15.6 ; v1(5.2,-13.7) 3.6,-13.7 -0.6,-9.5 -3.7,-9.5 -5,-8.2 ; v1(9.3,16.55) 8.35,15.6 4.4,15.6 ; 16.9,-17 25.5,-8.4 25.5,-3.5 ; v1(20.8,14.75) 20.3,14.25 20.3,1.7 v1(23,-1) 25.5,-3.5 ; v1(27.5,-3.5) 25.5,-3.5 ; -21.4,-2.1 -16.8,-6.7 -10.05,-6.7 ; -10.05,-6.7 -6.5,-6.7 -5,-8.2
  Bottom Layer w0.254: v1(-7.575,-19.2) 2.15,-19.2 5.2,-16.15 v1(5.2,-13.7) 7.4,-13.7 v1(8.9,-15.2) ; C109.1@5.25,15.5 C109.1@5.35,15.4
  Bottom Layer w0.508: C109.1@5.35,15.4 U104.1@9.3,15.4 v1(9.3,16.55) ; v1(12.6,5.8) 13.5,4.9 13.5,2.5 v1(12.7,1.7)
  other v1: 9.5,-18.5
+5V: 501.2 C101.1 C107.2 C301.2 C302.2 C304.2 C305.2 C501.1 C502.1 C503.1 C504.1 C505.1 C506.1 C507.1 C508.1 C509.1 C510.1 C511.1 C512.1 C513.1 C514.1 C515.1 C516.1 C517.1 C518.1 C519.1 C520.1 C521.1 C522.1 C523.1 C524.1 C525.1 C526.1 C527.1 C528.1 C529.1 C530.1 C531.1 C532.1 CAN_BUS.2 I2C.2 PT15.1 Q301.1 Q301.2 Q301.3 R105.2 R106.2 R302.2 R305.2 U102.3 U301.7 U302.1 U302.6 U303.1 U303.3 U502.2 U503.2 U504.2 U505.2 U506.2 U507.2 U508.2 U509.2 U510.2 U511.2 U512.2 U513.2 U514.2 U515.2 U516.2 U517.2 U518.2 U519.2 U520.2 U521.2 U522.2 U523.2 U524.2 U525.2 U526.2 U527.2 U528.2 U529.2 U530.2 U531.2 U532.2 | length 442.1
  Top Layer w0.254: R106.2@-24.45,-8.6 R106.2@-24.13,-8.6 ; v1(-11.225,-24) -10.925,-23.7 -10.925,-23.5 -10.55,-23.125 C305.2@-10.55,-22 ; U303.3@-10.425,-17.85 -10.425,-16.825 -10.325,-16.725 v1(-9.525,-16.725) ; U301.7@-5.025,-26.475 -3.9,-26.475 -3.7,-26.275 -3.7,-24.925 -3.475,-24.7 -3.475,-23.6 -3.3,-23.425 Q301.3@-2.275,-23.425 ; C304.2@-4.35,-15.8 -3,-15.8 -2.15,-16.65 U302.1@-2.15,-17.3
  Top Layer w0.508: v1(-28.3,-16.4) -27.4,-16.4 -26.8,-15.8 C101.1@-26.8,-14.925 ; C101.1@-26.735,-14.86 U102.3@-24.75,-14.86 ; R105.2@-24.45,-10 R106.2@-24.45,-8.6 ; R106.2@-24.13,-8.6 -23.34,-7.81 ; I2C.2@-23.34,-6.2 -23.34,-7.81 ; C107.2@-22.65,-8.5 -23.34,-7.81 ; PT15.1@-13.7,-25.3 -12.5,-24.1 v1(-12.5,-24)
  MidLayer1 w0.508: -36.975,0 501.2@-34.9,0 ; -36.351,6.9 U532.2@-34.4,6.9 ; -36.2,-7.35 -35.65,-6.8 U517.2@-34.3,-6.8 ; -34.286,13.911 -33.575,13.2 U516.2@-31.9,13.2 ; -31.145,19.975 -29.675,19.975 U531.2@-29.1,19.4 ; -30.55,-20.775 -30.475,-20.775 U518.2@-29.1,-19.4 U518.2@-29.35,-19.4 ; -29.08,-13.4 -28.3,-14.18 v1(-28.3,-16.4) ; -26.175,26.151 -26.175,26.075 U515.2@-24.6,24.5 ; -26.163,-26.163 U503.2@-24.75,-24.75 ; -20.975,30.45 -19.425,28.9 U530.2@-19.3,28.9 ; -20.8,-30.6 -19.5,-29.3 U519.2@-19.5,-29.1 ; -14.37,34.095 -13.3,33.025 U514.2@-13.3,32.2 ; -13.625,-34.4 -13.4,-34.175 U504.2@-13.4,-32.2 ; -6.901,36.351 -6.8,36.25 U529.2@-6.8,34.1 ; -6.8,-36.35 U520.2@-6.8,-34.2 ; U513.2@-0.1,34.8 -0.1,37 ; -0.025,-36.95 0,-36.925 U505.2@0,-34.8 ; U528.2@6.7,34.1 6.7,36.388 ; 6.775,-36.35 6.8,-36.325 U521.2@6.8,-34.1 ; U506.2@13.3,-32.1 13.3,-32.6 14.668,-33.968 ; U512.2@13.3,32.2 13.3,34.425 13.35,34.475 ; U522.2@19.3,-28.9 19.325,-28.9 20.934,-30.509 ; U527.2@19.3,29.1 20.775,30.575 20.775,30.6 ; U507.2@24.541,-24.541 26.163,-26.163 ; U511.2@24.6,24.9 26.013,26.313 ; U523.2@28.9,-19.4 29.025,-19.4 30.529,-20.904 ; U526.2@28.9,19.5 30.4,21 30.4,21.05 ; U508.2@32.1,-13.4 32.475,-13.775 34.34,-13.775 ; U510.2@32.1,13.4 33.575,13.4 34.225,14.05 ; U525.2@34.1,6.8 36.225,6.8 36.347,6.922 ; U524.2@34.2,-6.8 36.375,-6.8 36.4,-6.775 ; U509.2@34.7,0 37,0
  MidLayer1 w1.016: -34.095,-14.37 -33.125,-13.4 U502.2@-32.3,-13.4 -29.08,-13.4 -23.34,-7.66 ; I2C.2@-23.34,-6.2 -23.34,-7.66 ; CAN_BUS.2@-11.14,-11.8 -12.74,-10.2 -20.8,-10.2 -23.34,-7.66 ; 37,0 ccw(c0,0) 37,0
  Bottom Layer w0.254: v1(-11.225,-24) -11.225,-18.425 v1(-9.525,-16.725)
  Bottom Layer w0.508: C501.1@-36.9,-0.65 -36.25,0 501.2@-34.9,0 ; C532.1@-36.334,6.834 -34.466,6.834 U532.2@-34.4,6.9 ; C517.1@-36.166,-7.866 -35.099,-6.8 U517.2@-34.3,-6.8 ; C516.1@-34.275,13.885 -32.585,13.885 U516.2@-31.9,13.2 ; C502.1@-34.025,-14.815 -32.611,-13.4 U502.2@-32.3,-13.4 ; C531.1@-31.128,20.007 -29.707,20.007 U531.2@-29.1,19.4 ; C518.1@-30.472,-20.993 -30.472,-20.772 U518.2@-29.1,-19.4 ; C515.1@-26.599,25.601 -25.701,25.601 U515.2@-24.6,24.5 ; C503.1@-25.801,-26.499 -25.801,-25.801 U503.2@-24.75,-24.75 ; C530.1@-20.993,30.472 -20.872,30.472 U530.2@-19.3,28.9 ; C519.1@-20.107,-31.128 -20.107,-29.707 U519.2@-19.5,-29.1 ; C514.1@-14.615,34.025 -13.3,32.711 U514.2@-13.3,32.2 ; C504.1@-13.785,-34.375 -13.785,-32.585 U504.2@-13.4,-32.2 ; C529.1@-7.766,36.166 -6.8,35.199 U529.2@-6.8,34.1 ; U520.2@-6.8,-34.2 -6.734,-34.266 C520.1@-6.734,-36.434 ; C513.1@-0.65,37 -0.1,36.45 U513.2@-0.1,34.8 ; U505.2@0,-34.8 0,-36.45 C505.1@0.55,-37 ; U528.2@6.7,34.1 6.834,34.234 C528.1@6.834,36.334 ; U521.2@6.8,-34.1 6.8,-34.999 C521.1@7.866,-36.066 ; U506.2@13.3,-32.1 13.3,-32.611 C506.1@14.615,-33.925 ; U512.2@13.3,32.2 13.785,32.685 C512.1@13.785,34.375 ; U522.2@19.3,-28.9 20.772,-30.372 C522.1@21.093,-30.372 ; U527.2@19.3,29.1 20.207,30.007 C527.1@20.207,31.128 ; U507.2@24.541,-24.541 25.501,-25.501 C507.1@26.799,-25.501 ; U511.2@24.6,24.9 25.701,26.001 C511.1@25.701,26.499 ; U523.2@28.9,-19.4 29.707,-20.207 C523.1@31.028,-20.207 ; U526.2@28.9,19.5 30.372,20.972 C526.1@30.372,21.093 ; U508.2@32.1,-13.4 32.485,-13.785 C508.1@34.375,-13.785 ; U510.2@32.1,13.4 32.611,13.4 C510.1@33.925,14.715 ; U525.2@34.1,6.8 34.899,6.8 C525.1@36.066,7.966 ; U524.2@34.2,-6.8 36.268,-6.8 C524.1@36.434,-6.634 ; U509.2@34.7,0 36.55,0 C509.1@37,0.45
  other v1: -0.6,-21.8 0.5,-21.2 1.4,-20.4 -12.3,-16.5 -13.5,-15.5 -11,-15.5 -12.3,-14.5 -4.477,-14.427 -4.85,-13.325 -6.3,-12.2
CAN_RXD: PT3.1 U101.24 U102.4 | length 16.4
  Top Layer w0.508: U102.4@-24.8,-16.105 v1(-22.755,-16.105) v1@-22.75,-16.1 ; PT3.1@-23.6,-17.3 -23.6,-16.105 ; v1(-15.3,-8.65) U101.24@-15.3,-6.35
  Bottom Layer w0.508: v1(-22.755,-16.105) -20.275,-13.625 -20.275,-13.15 -15.775,-8.65 v1(-15.3,-8.65)
CAN_TXD: PT4.1 U101.23 U102.1 | length 12
  Top Layer w0.508: U102.1@-24.8,-12.295 v1(-22.83,-12.295) v1@-22.8,-12.325 ; v1(-18,-8) -16.475,-8 -16.1,-7.625 U101.23@-16.1,-6.35
  Bottom Layer w0.508: v1(-22.83,-12.295) -18.535,-8 v1(-18,-8)
CANH: CAN_BUS.3 PT1.1 U102.7 | length 10.1
  Top Layer w0.508: U102.7@-19.6,-13.565 -18.39,-13.565 -17.825,-13 -17.825,-10.675 PT1.1@-17.15,-10 -14.425,-10 -13.7,-10.725 CAN_BUS.3@-13.7,-11.775
CANL: CAN_BUS.4 PT2.1 U102.6 | length 5.8
  Top Layer w0.508: U102.6@-19.6,-14.835 -17.185,-14.835 -16.225,-13.875 CAN_BUS.4@-16.225,-11.8
CPLD_LED1: D202.1 U201.94 | length 25.1
  Top Layer w0.254: U201.94@9.7,14.35 9.7,12.475 11.575,10.6 v1(12.65,10.6)
  Top Layer w0.508: D202.1@4.05,18.5 v1(5.55,18.5)
  Bottom Layer w0.508: v1(5.55,18.5) 7.375,20.325 12.1,20.325 13.525,18.9 13.525,11.475 v1(12.65,10.6)
CPLD_LED2: D201.1 U201.93 | length 20.5
  Top Layer w0.254: U201.93@10.2,14.35 10.2,13.05 11.325,11.925 v1(12.625,11.925)
  Top Layer w0.508: D201.1@4.05,17.1 v1(5.65,17.1)
  Bottom Layer w0.508: v1(5.65,17.1) 7.9,19.35 11.625,19.35 12.625,18.35 v1(12.625,11.925)
FPGA_CLK: PT13.1 U201.22 U202.5 | length 11
  Top Layer w0.254: U202.5@0.75,-4.425 0.75,-2.95 0.2,-2.4 0.2,0.775 1.445,2.02 3,2.02 3.28,2.3 U201.22@5.15,2.3
FPGA_TSOP33_1: U201.6 U203.18 | length 34.1
  Top Layer w0.254: U203.18@-23.825,14.95 -23.825,13.65 -22.095,11.92 -18.305,11.92 -15.905,14.32 -5.645,14.32 -1.075,9.75 2.95,9.75 3.5,10.3 U201.6@5.15,10.3
FPGA_TSOP33_2: U201.2 U203.14 | length 30.2
  Top Layer w0.254: U203.14@-21.225,14.95 -21.225,13.45 -20.8,13.025 -18.475,13.025 -16.275,15.225 -5.1,15.225 -2.175,12.3 U201.2@5.15,12.3
FPGA_TSOP33_3: U201.11 U203.9 | length 29.6
  Top Layer w0.254: U203.9@-19.925,8.05 -19.925,9.325 -19.325,9.925 -17.575,9.925 -15.225,12.275 -6.3,12.275 -1.625,7.6 3.375,7.6 3.575,7.8 U201.11@5.15,7.8
FPGA_TSOP33_4: U201.8 U203.5 | length 32.8
  Top Layer w0.254: U203.5@-22.525,8.05 -22.525,9.45 -21.125,10.85 -18.05,10.85 -15.625,13.275 -5.925,13.275 -1.325,8.675 3.075,8.675 3.7,9.3 U201.8@5.15,9.3
FPGA_TSOP33_5: U201.54 U204.18 | length 17.8
  Top Layer w0.254: U201.54@20.25,2.3 25.375,2.3 26.2,1.475 26.2,-2.95 25.05,-4.1 25.05,-7.575 25.55,-8.075 U204.18@26.85,-8.075
FPGA_TSOP33_6: U201.50 U204.14 | length 15.6
  Top Layer w0.254: U201.50@18.7,-0.75 20.525,-0.75 24.025,-4.25 24.025,-9.9 24.8,-10.675 U204.14@26.85,-10.675
FPGA_TSOP33_7: U201.43 U204.9 | length 19.1
  Top Layer w0.254: U201.43@15.2,-0.75 15.2,-2.15 v1(15.525,-2.475) ; v1(19.725,-2.8) 20.5,-2.8 23,-5.3 23,-10.125 21.15,-11.975 U204.9@19.95,-11.975
  Bottom Layer w0.254: v1(15.525,-2.475) 15.85,-2.8 v1(19.725,-2.8)
FPGA_TSOP33_8: U201.41 U204.5 | length 17.2
  Top Layer w0.254: U201.41@14.2,-0.75 14.2,-4.225 14.45,-4.475 v1(15.025,-4.475) ; v1(19.75,-4.475) 20.525,-4.475 21.95,-5.9 21.95,-9.025 21.6,-9.375 U204.5@19.95,-9.375
  Bottom Layer w0.254: v1(15.025,-4.475) v1(19.75,-4.475)
FPGA_TSOP33_9: U201.74 U205.18 | length 6
  Top Layer w0.254: U201.74@20.25,12.3 22.925,12.3 23.05,12.175 24.65,12.175 24.875,12.4 U205.18@24.875,13.65
FPGA_TSOP33_10: U201.72 U205.14 | length 8.9
  Top Layer w0.254: U201.72@20.25,11.3 26.4,11.3 27.475,12.375 U205.14@27.475,13.65
FPGA_TSOP33_11: U201.70 U205.9 | length 11.2
  Top Layer w0.254: U201.70@20.25,10.3 27.2,10.3 28.775,8.725 U205.9@28.775,6.75
FPGA_TSOP33_12: U201.67 U205.5 | length 7.8
  Top Layer w0.254: U201.67@20.25,8.8 25.9,8.8 26.175,8.525 U205.5@26.175,6.75
FPGA_TSOP33_13: PT10.1 U201.85 U206.18 | length 31.1
  Top Layer w0.254: U206.18@-9.575,19.95 -9.575,21.25 -9.025,21.8 -2.5,21.8 -0.125,19.425 13.725,19.425 14.2,18.95 U201.85@14.2,14.35
FPGA_TSOP33_14: U201.81 U206.14 | length 36.5
  Top Layer w0.254: U206.14@-12.175,19.95 -12.175,21.525 -10.925,22.775 -1.975,22.775 0.475,20.325 6.155,20.325 14.625,20.325 15.175,19.775 15.175,17.225 16.2,16.2 U201.81@16.2,14.35
FPGA_TSOP33_15: U201.79 U206.9 | length 40
  Top Layer w0.254: U206.9@-13.475,26.85 -13.475,25.3 -12.025,23.85 -1.425,23.85 1.075,21.35 15.775,21.35 16.125,21 16.125,17.7 17.2,16.625 U201.79@17.2,14.35
FPGA_TSOP33_16: U201.77 U206.5 | length 38.6
  Top Layer w0.254: U206.5@-10.875,26.85 -10.875,25.55 -10.2,24.875 -0.9,24.875 1.625,22.35 16.25,22.35 17.1,21.5 17.1,18.275 18.2,17.175 U201.77@18.2,14.35
FPGA_TSOP40_1: U201.3 U203.16 | length 31.9
  Top Layer w0.254: U203.16@-22.525,14.95 -22.525,13.3 -21.633,12.408 -18.442,12.408 -16.075,14.775 -5.4,14.775 -2.4,11.775 5.125,11.775 U201.3@5.15,11.8
FPGA_TSOP40_2: U201.1 U203.12 | length 28.5
  Top Layer w0.254: U203.12@-19.925,14.95 -19.925,13.675 -19.725,13.475 -18.675,13.475 -16.475,15.675 -4.85,15.675 -1.975,12.8 U201.1@5.15,12.8
FPGA_TSOP40_3: U201.9 U203.7 | length 31.6
  Top Layer w0.254: U203.7@-21.225,8.05 -21.225,9.775 -20.625,10.375 -17.85,10.375 -15.425,12.8 -6.15,12.8 -1.475,8.125 3.2,8.125 3.875,8.8 U201.9@5.15,8.8
FPGA_TSOP40_4: U201.7 U203.3 | length 34.5
  Top Layer w0.254: U203.3@-23.825,8.05 -23.825,9.775 -22.2,11.4 -18.15,11.4 -15.8,13.75 -5.75,13.75 -1.175,9.175 2.975,9.175 3.6,9.8 U201.7@5.15,9.8
FPGA_TSOP40_5: U201.53 U204.16 | length 18.7
  Top Layer w0.254: U201.53@20.25,1.8 25.225,1.8 25.7,1.325 25.7,-2.775 24.575,-3.9 24.575,-8.75 25.2,-9.375 U204.16@26.85,-9.375
FPGA_TSOP40_6: U201.49 U204.12 | length 17.3
  Top Layer w0.254: U201.49@18.2,-0.75 18.2,-2.125 18.4,-2.325 18.975,-2.325 19.2,-2.1 20.6,-2.1 23.5,-5 23.5,-10.2 25.275,-11.975 U204.12@26.85,-11.975
FPGA_TSOP40_7: U201.42 U204.7 | length 18.1
  Top Layer w0.254: U201.42@14.7,-0.75 14.7,-3.025 v1(15,-3.325) ; v1(18.975,-3.625) 20.525,-3.625 22.525,-5.625 22.525,-9.4 21.25,-10.675 U204.7@19.95,-10.675
  Bottom Layer w0.254: v1(15,-3.325) 15.3,-3.625 v1(18.975,-3.625)
FPGA_TSOP40_8: U201.40 U204.3 | length 15.7
  Top Layer w0.254: U201.40@13.7,-0.75 13.7,-4.75 v1(14.225,-5.275) ; v1(19.025,-5.275) 20.55,-5.275 21.5,-6.225 21.5,-7.95 21.375,-8.075 U204.3@19.95,-8.075
  Bottom Layer w0.254: v1(14.225,-5.275) v1(19.025,-5.275)
FPGA_TSOP40_9: U201.73 U205.16 | length 7.4
  Top Layer w0.254: U201.73@20.25,11.8 22.65,11.8 22.725,11.725 25.4,11.725 26.175,12.5 U205.16@26.175,13.65
FPGA_TSOP40_10: U201.71 U205.12 | length 10.4
  Top Layer w0.254: U201.71@20.25,10.8 27.1,10.8 28.775,12.475 U205.12@28.775,13.65
FPGA_TSOP40_11: U201.68 U205.7 | length 9.5
  Top Layer w0.254: U201.68@20.25,9.3 27.025,9.3 27.475,8.85 U205.7@27.475,6.75
FPGA_TSOP40_12: PT9.1 U201.66 U205.3 | length 6
  Top Layer w0.254: U201.66@20.25,8.3 24.625,8.3 24.875,8.05 U205.3@24.875,6.75
FPGA_TSOP40_13: U201.82 U206.16 | length 34.1
  Top Layer w0.254: U206.16@-10.875,19.95 -10.875,21.3 -9.825,22.35 -2.175,22.35 0.3,19.875 14.3,19.875 14.725,19.45 14.725,16.95 15.7,15.975 U201.82@15.7,14.35
FPGA_TSOP40_14: U201.80 U206.12 | length 39.4
  Top Layer w0.254: U206.12@-13.475,19.95 -13.475,22.325 -12.475,23.325 -1.7,23.325 0.8,20.825 14.95,20.825 15.65,20.125 15.65,17.5 16.7,16.45 U201.80@16.7,14.35